# EAGLE board Sparkfun_AS6212_Qwiic-Panel (EAGLE 9.6.2), part 1 of 4
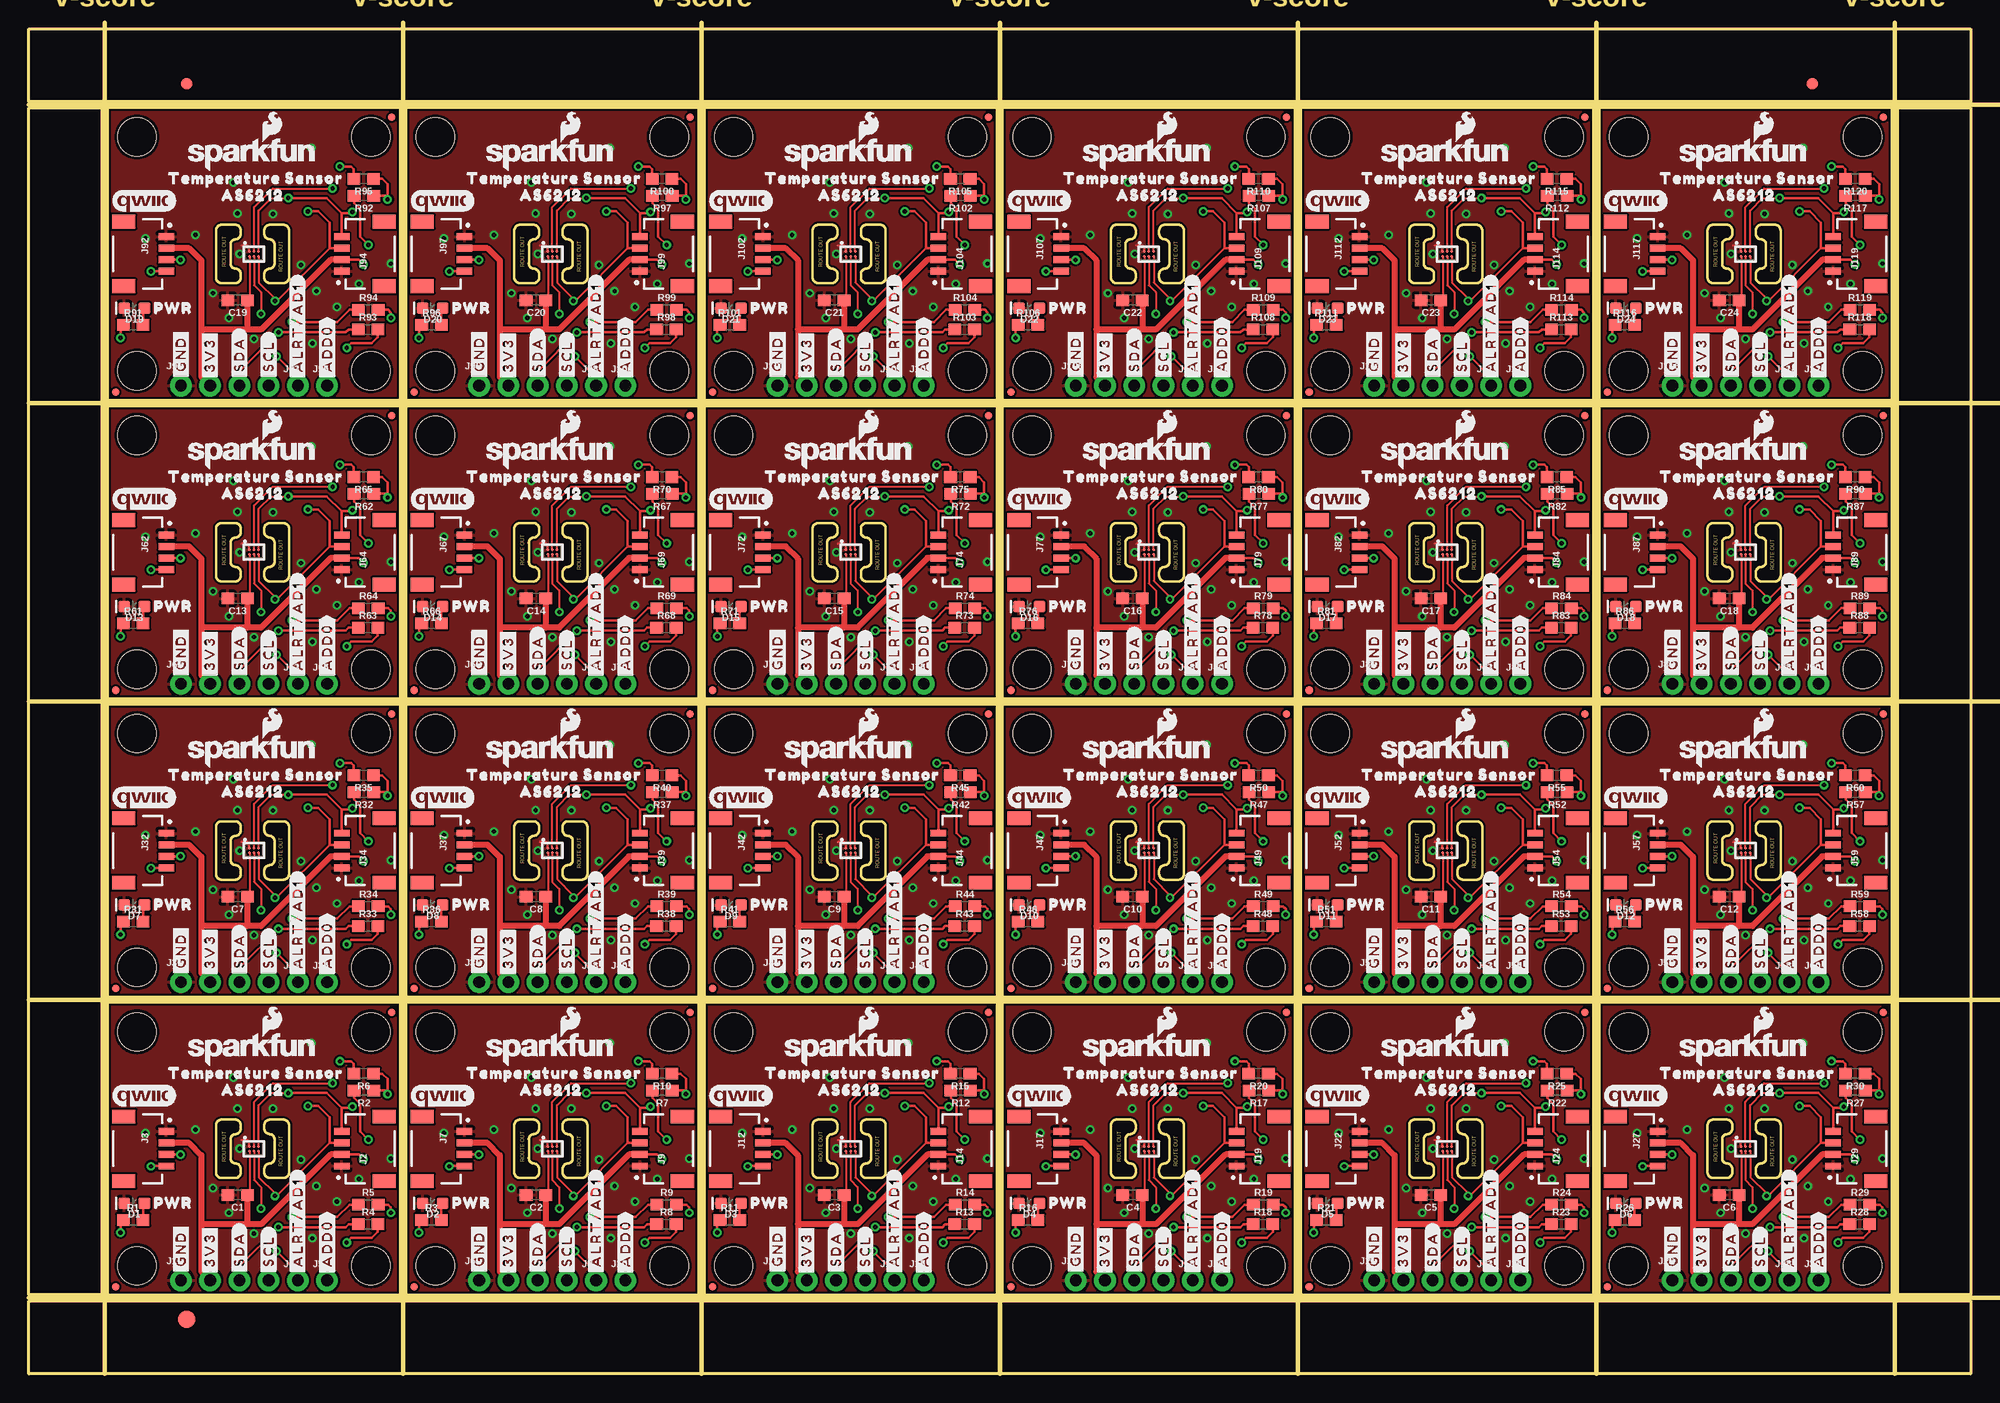
[diagram p0: board, top side]
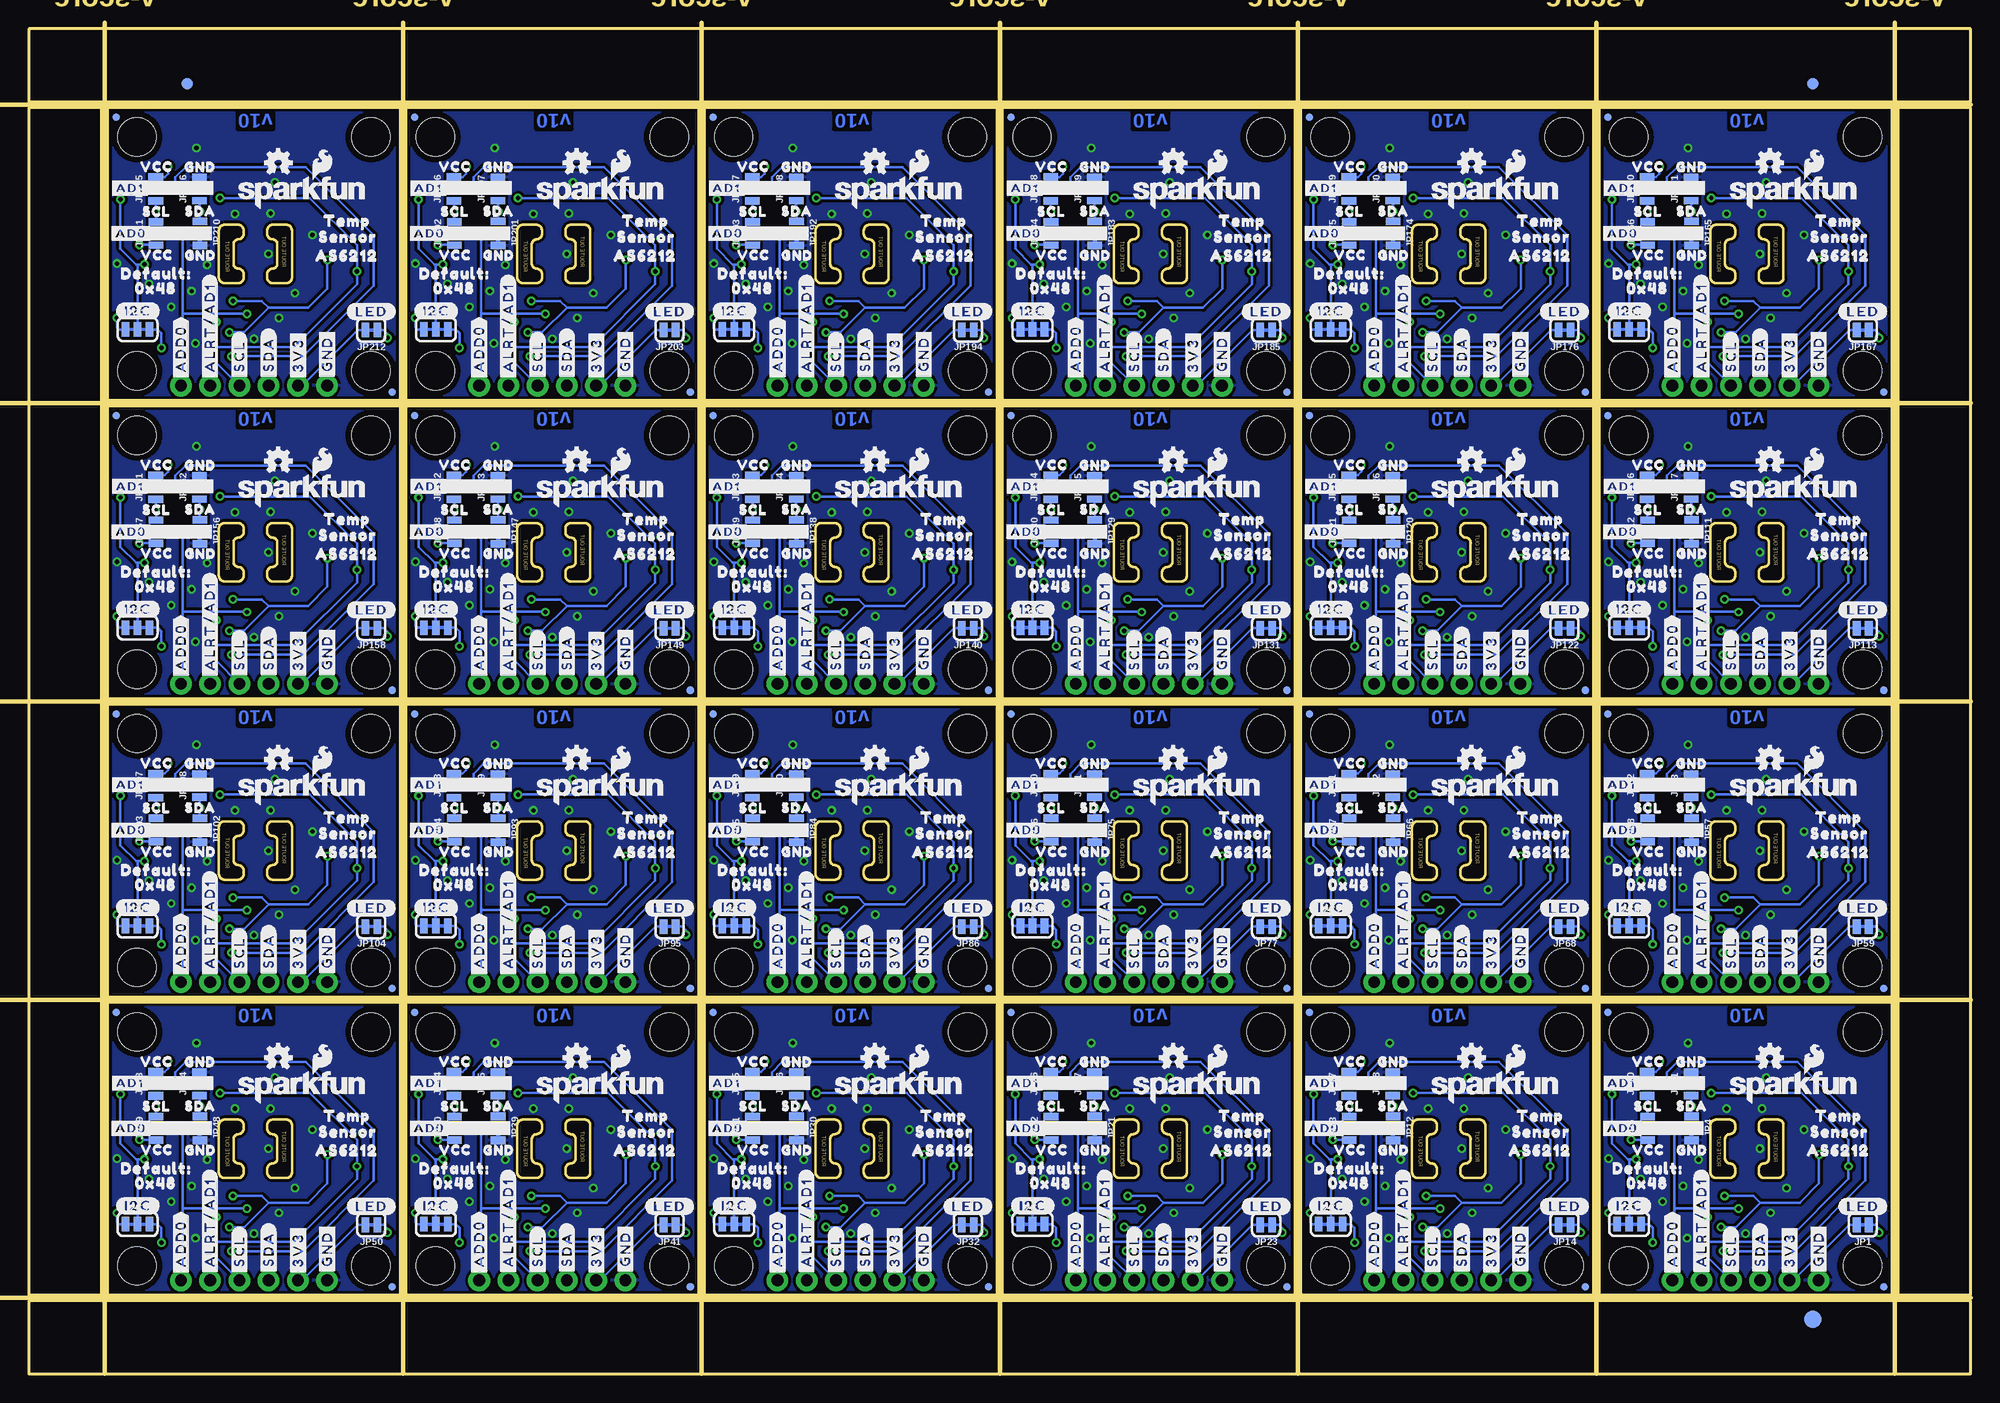
[diagram p1: board, bottom side, seen from below]

Size 168.66 x 116.84 mm. Coordinates in mm from the lower left corner, seen from the top.
Outline: 784 segments
Copper layers (1*16): Top 0.035mm / dielectric 1.5mm / Bottom 0.035mm
Design rules "Sparkfun_AS6212_Qwiic": minimum track width 7mil, minimum drill 0.3mm, track to track 7mil, track to pad 7mil, pad to pad 7mil, via to via 7mil, smd to smd 7mil, copper to edge 7mil, drill to drill 7mil, minimum pad ring 7mil, minimum via ring 7mil, stop-mask expansion 3mil, vias tented up to drill 25mil, thermal gap 10mil
tRestrict: area 18.8,19.7 to 18.8,19.8; area 44.7,19.7 to 44.7,19.8; area 70.6,19.7 to 70.6,19.8; area 96.5,19.7 to 96.5,19.8; area 122.4,19.7 to 122.5,19.8; area 148.3,19.7 to 148.4,19.8; area 18.8,45.6 to 18.8,45.7; area 44.7,45.6 to 44.7,45.7; area 70.6,45.6 to 70.6,45.7; area 96.5,45.6 to 96.5,45.7; area 122.4,45.6 to 122.5,45.7; area 148.3,45.6 to 148.4,45.7; 12 more areas
Milling: 12 lines

## Footprints (pad centres in the part's own frame; a part is rotated, then mirrored left to right if it is on the bottom)
0603 = smd 1.1 x 1: 1 -0.85,0; 2 0.85,0
LED-0603 = smd 1 x 1: A -0.877,0; C 0.877,0
FIDUCIAL-1X2 = smd 1 x 1: 1 0,0
FIDUCIAL-1.5X3 = smd 1.5 x 1.5: 1 0,0
FIDUCIAL-MICRO = smd 0.635 x 0.635: 1 0,0
SMT-JUMPER_3_2-NC_TRACE_SILK = smd 0.66 x 1.27: 1 -1.041,0; 2 0,0; 3 1.041,0
1X04_NO_SILK = drill 1.016 pad 1.88: 1 0,0; 2 2.54,0; 3 5.08,0; 4 7.62,0
JST04_1MM_RA = smd 0.6 x 1.35: 1 -1.5,0; 2 -0.5,0; 3 0.5,0; 4 1.5,0 | smd 1.2 x 2: NC1 2.8,-3.675; NC2 -2.8,-3.675
1X01_NO_SILK = drill 1.016 pad 1.88: 1 0,0
SMT-JUMPER_2_NC_TRACE_SILK = smd 0.66 x 1.27: 1 -0.521,0; 2 0.521,0
STAND-OFF = hole 3.302: 0,0
SMT-JUMPER_3_1-NC_TRACE_NO-SILK = smd 0.66 x 1.27: 1 -1.041,0; 2 0,0; 3 1.041,0
SMT-JUMPER_3_0-NO_TRACE_NO-SILK = smd 0.635 x 1.27: 1 -1.016,0; 2 0,0; 3 1.016,0
WLCSP = smd 0.25 x 0.25: A1 -0.4,0.2; A2 0,0.2; A3 0.4,0.2; B1 -0.4,-0.2; B2 0,-0.2; B3 0.4,-0.2

## Placement (x,y rotation side)
C1  0.1uF  [0603]  18.14,15.54 180 top
C2  0.1uF  [0603]  44.04,15.54 180 top
C3  0.1uF  [0603]  69.95,15.54 180 top
C4  0.1uF  [0603]  95.86,15.54 180 top
C5  0.1uF  [0603]  121.77,15.54 180 top
C6  0.1uF  [0603]  147.68,15.54 180 top
C7  0.1uF  [0603]  18.14,41.45 180 top
C8  0.1uF  [0603]  44.04,41.45 180 top
C9  0.1uF  [0603]  69.95,41.45 180 top
C10  0.1uF  [0603]  95.86,41.45 180 top
C11  0.1uF  [0603]  121.77,41.45 180 top
C12  0.1uF  [0603]  147.68,41.45 180 top
C13  0.1uF  [0603]  18.14,67.36 180 top
C14  0.1uF  [0603]  44.04,67.36 180 top
C15  0.1uF  [0603]  69.95,67.36 180 top
C16  0.1uF  [0603]  95.86,67.36 180 top
C17  0.1uF  [0603]  121.77,67.36 180 top
C18  0.1uF  [0603]  147.68,67.36 180 top
C19  0.1uF  [0603]  18.14,93.27 180 top
C20  0.1uF  [0603]  44.04,93.27 180 top
C21  0.1uF  [0603]  69.95,93.27 180 top
C22  0.1uF  [0603]  95.86,93.27 180 top
C23  0.1uF  [0603]  121.77,93.27 180 top
C24  0.1uF  [0603]  147.68,93.27 180 top
D1  RED  [LED-0603]  9.17,14.83 180 top
D2  RED  [LED-0603]  35.08,14.83 180 top
D3  RED  [LED-0603]  60.99,14.83 180 top
D4  RED  [LED-0603]  86.89,14.83 180 top
D5  RED  [LED-0603]  112.8,14.83 180 top
D6  RED  [LED-0603]  138.71,14.83 180 top
D7  RED  [LED-0603]  9.17,40.74 180 top
D8  RED  [LED-0603]  35.08,40.74 180 top
D9  RED  [LED-0603]  60.99,40.74 180 top
D10  RED  [LED-0603]  86.89,40.74 180 top
D11  RED  [LED-0603]  112.8,40.74 180 top
D12  RED  [LED-0603]  138.71,40.74 180 top
D13  RED  [LED-0603]  9.17,66.65 180 top
D14  RED  [LED-0603]  35.08,66.65 180 top
D15  RED  [LED-0603]  60.99,66.65 180 top
D16  RED  [LED-0603]  86.89,66.65 180 top
D17  RED  [LED-0603]  112.8,66.65 180 top
D18  RED  [LED-0603]  138.71,66.65 180 top
D19  RED  [LED-0603]  9.17,92.56 180 top
D20  RED  [LED-0603]  35.08,92.56 180 top
D21  RED  [LED-0603]  60.99,92.56 180 top
D22  RED  [LED-0603]  86.89,92.56 180 top
D23  RED  [LED-0603]  112.8,92.56 180 top
D24  RED  [LED-0603]  138.71,92.56 180 top
E$1  [FIDUCIAL-1X2]  13.72,112.08 0 top
E$2  [FIDUCIAL-1X2]  13.72,112.08 0 bottom
E$3  [FIDUCIAL-1X2]  154.88,112.08 0 top
E$4  [FIDUCIAL-1X2]  154.88,112.08 0 bottom
E$5  [FIDUCIAL-1.5X3]  13.72,4.76 0 top
E$6  [FIDUCIAL-1.5X3]  13.72,4.76 0 bottom
FD1  FIDUCIALUFIDUCIAL  [FIDUCIAL-MICRO]  7.57,7.57 0 top
FD2  FIDUCIALUFIDUCIAL  [FIDUCIAL-MICRO]  31.52,31.42 0 top
FD3  FIDUCIALUFIDUCIAL  [FIDUCIAL-MICRO]  31.52,31.42 0 bottom
FD4  FIDUCIALUFIDUCIAL  [FIDUCIAL-MICRO]  7.57,7.57 0 bottom
FD5  FIDUCIALUFIDUCIAL  [FIDUCIAL-MICRO]  33.48,7.57 0 top
FD6  FIDUCIALUFIDUCIAL  [FIDUCIAL-MICRO]  57.43,31.42 0 top
FD7  FIDUCIALUFIDUCIAL  [FIDUCIAL-MICRO]  57.43,31.42 0 bottom
FD8  FIDUCIALUFIDUCIAL  [FIDUCIAL-MICRO]  33.48,7.57 0 bottom
FD9  FIDUCIALUFIDUCIAL  [FIDUCIAL-MICRO]  59.39,7.57 0 top
FD10  FIDUCIALUFIDUCIAL  [FIDUCIAL-MICRO]  83.34,31.42 0 top
FD11  FIDUCIALUFIDUCIAL  [FIDUCIAL-MICRO]  83.34,31.42 0 bottom
FD12  FIDUCIALUFIDUCIAL  [FIDUCIAL-MICRO]  59.39,7.57 0 bottom
FD13  FIDUCIALUFIDUCIAL  [FIDUCIAL-MICRO]  85.29,7.57 0 top
FD14  FIDUCIALUFIDUCIAL  [FIDUCIAL-MICRO]  109.25,31.42 0 top
FD15  FIDUCIALUFIDUCIAL  [FIDUCIAL-MICRO]  109.25,31.42 0 bottom
FD16  FIDUCIALUFIDUCIAL  [FIDUCIAL-MICRO]  85.29,7.57 0 bottom
FD17  FIDUCIALUFIDUCIAL  [FIDUCIAL-MICRO]  111.2,7.57 0 top
FD18  FIDUCIALUFIDUCIAL  [FIDUCIAL-MICRO]  135.15,31.42 0 top
FD19  FIDUCIALUFIDUCIAL  [FIDUCIAL-MICRO]  135.15,31.42 0 bottom
FD20  FIDUCIALUFIDUCIAL  [FIDUCIAL-MICRO]  111.2,7.57 0 bottom
FD21  FIDUCIALUFIDUCIAL  [FIDUCIAL-MICRO]  137.11,7.57 0 top
FD22  FIDUCIALUFIDUCIAL  [FIDUCIAL-MICRO]  161.06,31.42 0 top
FD23  FIDUCIALUFIDUCIAL  [FIDUCIAL-MICRO]  161.06,31.42 0 bottom
FD24  FIDUCIALUFIDUCIAL  [FIDUCIAL-MICRO]  137.11,7.57 0 bottom
FD25  FIDUCIALUFIDUCIAL  [FIDUCIAL-MICRO]  7.57,33.48 0 top
FD26  FIDUCIALUFIDUCIAL  [FIDUCIAL-MICRO]  31.52,57.33 0 top
FD27  FIDUCIALUFIDUCIAL  [FIDUCIAL-MICRO]  31.52,57.33 0 bottom
FD28  FIDUCIALUFIDUCIAL  [FIDUCIAL-MICRO]  7.57,33.48 0 bottom
FD29  FIDUCIALUFIDUCIAL  [FIDUCIAL-MICRO]  33.48,33.48 0 top
FD30  FIDUCIALUFIDUCIAL  [FIDUCIAL-MICRO]  57.43,57.33 0 top
FD31  FIDUCIALUFIDUCIAL  [FIDUCIAL-MICRO]  57.43,57.33 0 bottom
FD32  FIDUCIALUFIDUCIAL  [FIDUCIAL-MICRO]  33.48,33.48 0 bottom
FD33  FIDUCIALUFIDUCIAL  [FIDUCIAL-MICRO]  59.39,33.48 0 top
FD34  FIDUCIALUFIDUCIAL  [FIDUCIAL-MICRO]  83.34,57.33 0 top
FD35  FIDUCIALUFIDUCIAL  [FIDUCIAL-MICRO]  83.34,57.33 0 bottom
FD36  FIDUCIALUFIDUCIAL  [FIDUCIAL-MICRO]  59.39,33.48 0 bottom
FD37  FIDUCIALUFIDUCIAL  [FIDUCIAL-MICRO]  85.29,33.48 0 top
FD38  FIDUCIALUFIDUCIAL  [FIDUCIAL-MICRO]  109.25,57.33 0 top
FD39  FIDUCIALUFIDUCIAL  [FIDUCIAL-MICRO]  109.25,57.33 0 bottom
FD40  FIDUCIALUFIDUCIAL  [FIDUCIAL-MICRO]  85.29,33.48 0 bottom
FD41  FIDUCIALUFIDUCIAL  [FIDUCIAL-MICRO]  111.2,33.48 0 top
FD42  FIDUCIALUFIDUCIAL  [FIDUCIAL-MICRO]  135.15,57.33 0 top
FD43  FIDUCIALUFIDUCIAL  [FIDUCIAL-MICRO]  135.15,57.33 0 bottom
FD44  FIDUCIALUFIDUCIAL  [FIDUCIAL-MICRO]  111.2,33.48 0 bottom
FD45  FIDUCIALUFIDUCIAL  [FIDUCIAL-MICRO]  137.11,33.48 0 top
FD46  FIDUCIALUFIDUCIAL  [FIDUCIAL-MICRO]  161.06,57.33 0 top
FD47  FIDUCIALUFIDUCIAL  [FIDUCIAL-MICRO]  161.06,57.33 0 bottom
FD48  FIDUCIALUFIDUCIAL  [FIDUCIAL-MICRO]  137.11,33.48 0 bottom
FD49  FIDUCIALUFIDUCIAL  [FIDUCIAL-MICRO]  7.57,59.39 0 top
FD50  FIDUCIALUFIDUCIAL  [FIDUCIAL-MICRO]  31.52,83.24 0 top
FD51  FIDUCIALUFIDUCIAL  [FIDUCIAL-MICRO]  31.52,83.24 0 bottom
FD52  FIDUCIALUFIDUCIAL  [FIDUCIAL-MICRO]  7.57,59.39 0 bottom
FD53  FIDUCIALUFIDUCIAL  [FIDUCIAL-MICRO]  33.48,59.39 0 top
FD54  FIDUCIALUFIDUCIAL  [FIDUCIAL-MICRO]  57.43,83.24 0 top
FD55  FIDUCIALUFIDUCIAL  [FIDUCIAL-MICRO]  57.43,83.24 0 bottom
FD56  FIDUCIALUFIDUCIAL  [FIDUCIAL-MICRO]  33.48,59.39 0 bottom
FD57  FIDUCIALUFIDUCIAL  [FIDUCIAL-MICRO]  59.39,59.39 0 top
FD58  FIDUCIALUFIDUCIAL  [FIDUCIAL-MICRO]  83.34,83.24 0 top
FD59  FIDUCIALUFIDUCIAL  [FIDUCIAL-MICRO]  83.34,83.24 0 bottom
FD60  FIDUCIALUFIDUCIAL  [FIDUCIAL-MICRO]  59.39,59.39 0 bottom
FD61  FIDUCIALUFIDUCIAL  [FIDUCIAL-MICRO]  85.29,59.39 0 top
FD62  FIDUCIALUFIDUCIAL  [FIDUCIAL-MICRO]  109.25,83.24 0 top
FD63  FIDUCIALUFIDUCIAL  [FIDUCIAL-MICRO]  109.25,83.24 0 bottom
FD64  FIDUCIALUFIDUCIAL  [FIDUCIAL-MICRO]  85.29,59.39 0 bottom
FD65  FIDUCIALUFIDUCIAL  [FIDUCIAL-MICRO]  111.2,59.39 0 top
FD66  FIDUCIALUFIDUCIAL  [FIDUCIAL-MICRO]  135.15,83.24 0 top
FD67  FIDUCIALUFIDUCIAL  [FIDUCIAL-MICRO]  135.15,83.24 0 bottom
FD68  FIDUCIALUFIDUCIAL  [FIDUCIAL-MICRO]  111.2,59.39 0 bottom
FD69  FIDUCIALUFIDUCIAL  [FIDUCIAL-MICRO]  137.11,59.39 0 top
FD70  FIDUCIALUFIDUCIAL  [FIDUCIAL-MICRO]  161.06,83.24 0 top
FD71  FIDUCIALUFIDUCIAL  [FIDUCIAL-MICRO]  161.06,83.24 0 bottom
FD72  FIDUCIALUFIDUCIAL  [FIDUCIAL-MICRO]  137.11,59.39 0 bottom
FD73  FIDUCIALUFIDUCIAL  [FIDUCIAL-MICRO]  7.57,85.29 0 top
FD74  FIDUCIALUFIDUCIAL  [FIDUCIAL-MICRO]  31.52,109.14 0 top
FD75  FIDUCIALUFIDUCIAL  [FIDUCIAL-MICRO]  31.52,109.14 0 bottom
FD76  FIDUCIALUFIDUCIAL  [FIDUCIAL-MICRO]  7.57,85.29 0 bottom
FD77  FIDUCIALUFIDUCIAL  [FIDUCIAL-MICRO]  33.48,85.29 0 top
FD78  FIDUCIALUFIDUCIAL  [FIDUCIAL-MICRO]  57.43,109.14 0 top
FD79  FIDUCIALUFIDUCIAL  [FIDUCIAL-MICRO]  57.43,109.14 0 bottom
FD80  FIDUCIALUFIDUCIAL  [FIDUCIAL-MICRO]  33.48,85.29 0 bottom
FD81  FIDUCIALUFIDUCIAL  [FIDUCIAL-MICRO]  59.39,85.29 0 top
FD82  FIDUCIALUFIDUCIAL  [FIDUCIAL-MICRO]  83.34,109.14 0 top
FD83  FIDUCIALUFIDUCIAL  [FIDUCIAL-MICRO]  83.34,109.14 0 bottom
FD84  FIDUCIALUFIDUCIAL  [FIDUCIAL-MICRO]  59.39,85.29 0 bottom
FD85  FIDUCIALUFIDUCIAL  [FIDUCIAL-MICRO]  85.29,85.29 0 top
FD86  FIDUCIALUFIDUCIAL  [FIDUCIAL-MICRO]  109.25,109.14 0 top
FD87  FIDUCIALUFIDUCIAL  [FIDUCIAL-MICRO]  109.25,109.14 0 bottom
FD88  FIDUCIALUFIDUCIAL  [FIDUCIAL-MICRO]  85.29,85.29 0 bottom
FD89  FIDUCIALUFIDUCIAL  [FIDUCIAL-MICRO]  111.2,85.29 0 top
FD90  FIDUCIALUFIDUCIAL  [FIDUCIAL-MICRO]  135.15,109.14 0 top
FD91  FIDUCIALUFIDUCIAL  [FIDUCIAL-MICRO]  135.15,109.14 0 bottom
FD92  FIDUCIALUFIDUCIAL  [FIDUCIAL-MICRO]  111.2,85.29 0 bottom
FD93  FIDUCIALUFIDUCIAL  [FIDUCIAL-MICRO]  137.11,85.29 0 top
FD94  FIDUCIALUFIDUCIAL  [FIDUCIAL-MICRO]  161.06,109.14 0 top
FD95  FIDUCIALUFIDUCIAL  [FIDUCIAL-MICRO]  161.06,109.14 0 bottom
FD96  FIDUCIALUFIDUCIAL  [FIDUCIAL-MICRO]  137.11,85.29 0 bottom
I2C  [SMT-JUMPER_3_2-NC_TRACE_SILK]  29.67,13 0 bottom
I2C1  [SMT-JUMPER_3_2-NC_TRACE_SILK]  55.58,13 0 bottom
I2C2  [SMT-JUMPER_3_2-NC_TRACE_SILK]  81.48,13 0 bottom
I2C3  [SMT-JUMPER_3_2-NC_TRACE_SILK]  107.39,13 0 bottom
I2C4  [SMT-JUMPER_3_2-NC_TRACE_SILK]  133.3,13 0 bottom
I2C5  [SMT-JUMPER_3_2-NC_TRACE_SILK]  159.21,13 0 bottom
I2C6  [SMT-JUMPER_3_2-NC_TRACE_SILK]  29.67,38.91 0 bottom
I2C7  [SMT-JUMPER_3_2-NC_TRACE_SILK]  55.58,38.91 0 bottom
I2C8  [SMT-JUMPER_3_2-NC_TRACE_SILK]  81.48,38.91 0 bottom
I2C9  [SMT-JUMPER_3_2-NC_TRACE_SILK]  107.39,38.91 0 bottom
I2C10  [SMT-JUMPER_3_2-NC_TRACE_SILK]  133.3,38.91 0 bottom
I2C11  [SMT-JUMPER_3_2-NC_TRACE_SILK]  159.21,38.91 0 bottom
I2C12  [SMT-JUMPER_3_2-NC_TRACE_SILK]  29.67,64.82 0 bottom
I2C13  [SMT-JUMPER_3_2-NC_TRACE_SILK]  55.58,64.82 0 bottom
I2C14  [SMT-JUMPER_3_2-NC_TRACE_SILK]  81.48,64.82 0 bottom
I2C15  [SMT-JUMPER_3_2-NC_TRACE_SILK]  107.39,64.82 0 bottom
I2C16  [SMT-JUMPER_3_2-NC_TRACE_SILK]  133.3,64.82 0 bottom
I2C17  [SMT-JUMPER_3_2-NC_TRACE_SILK]  159.21,64.82 0 bottom
I2C18  [SMT-JUMPER_3_2-NC_TRACE_SILK]  29.67,90.73 0 bottom
I2C19  [SMT-JUMPER_3_2-NC_TRACE_SILK]  55.58,90.73 0 bottom
I2C20  [SMT-JUMPER_3_2-NC_TRACE_SILK]  81.48,90.73 0 bottom
I2C21  [SMT-JUMPER_3_2-NC_TRACE_SILK]  107.39,90.73 0 bottom
I2C22  [SMT-JUMPER_3_2-NC_TRACE_SILK]  133.3,90.73 0 bottom
I2C23  [SMT-JUMPER_3_2-NC_TRACE_SILK]  159.21,90.73 0 bottom
J1  PTH  [1X04_NO_SILK]  13.21,8.13 0 top
J2  QWIIC_RA  [JST04_1MM_RA]  27.18,19.56 90 top
J3  QWIIC_RA  [JST04_1MM_RA]  11.94,19.56 270 top
J4  [1X01_NO_SILK]  23.37,8.13 0 top
J5  [1X01_NO_SILK]  25.91,8.13 0 top
J6  PTH  [1X04_NO_SILK]  39.12,8.13 0 top
J7  QWIIC_RA  [JST04_1MM_RA]  37.85,19.56 270 top
J8  [1X01_NO_SILK]  49.28,8.13 0 top
J9  QWIIC_RA  [JST04_1MM_RA]  53.09,19.56 90 top
J10  [1X01_NO_SILK]  51.82,8.13 0 top
J11  PTH  [1X04_NO_SILK]  65.02,8.13 0 top
J12  QWIIC_RA  [JST04_1MM_RA]  63.75,19.56 270 top
J13  [1X01_NO_SILK]  75.18,8.13 0 top
J14  QWIIC_RA  [JST04_1MM_RA]  78.99,19.56 90 top
J15  [1X01_NO_SILK]  77.72,8.13 0 top
J16  PTH  [1X04_NO_SILK]  90.93,8.13 0 top
J17  QWIIC_RA  [JST04_1MM_RA]  89.66,19.56 270 top
J18  [1X01_NO_SILK]  101.09,8.13 0 top
J19  QWIIC_RA  [JST04_1MM_RA]  104.9,19.56 90 top
J20  [1X01_NO_SILK]  103.63,8.13 0 top
J21  PTH  [1X04_NO_SILK]  116.84,8.13 0 top
J22  QWIIC_RA  [JST04_1MM_RA]  115.57,19.56 270 top
J23  [1X01_NO_SILK]  127,8.13 0 top
J24  QWIIC_RA  [JST04_1MM_RA]  130.81,19.56 90 top
J25  [1X01_NO_SILK]  129.54,8.13 0 top
J26  PTH  [1X04_NO_SILK]  142.75,8.13 0 top
J27  QWIIC_RA  [JST04_1MM_RA]  141.48,19.56 270 top
J28  [1X01_NO_SILK]  152.91,8.13 0 top
J29  QWIIC_RA  [JST04_1MM_RA]  156.72,19.56 90 top
J30  [1X01_NO_SILK]  155.45,8.13 0 top
J31  PTH  [1X04_NO_SILK]  13.21,34.04 0 top
J32  QWIIC_RA  [JST04_1MM_RA]  11.94,45.47 270 top
J33  [1X01_NO_SILK]  23.37,34.04 0 top
J34  QWIIC_RA  [JST04_1MM_RA]  27.18,45.47 90 top
J35  [1X01_NO_SILK]  25.91,34.04 0 top
J36  PTH  [1X04_NO_SILK]  39.12,34.04 0 top
J37  QWIIC_RA  [JST04_1MM_RA]  37.85,45.47 270 top
J38  [1X01_NO_SILK]  49.28,34.04 0 top
J39  QWIIC_RA  [JST04_1MM_RA]  53.09,45.47 90 top
J40  [1X01_NO_SILK]  51.82,34.04 0 top
J41  PTH  [1X04_NO_SILK]  65.02,34.04 0 top
J42  QWIIC_RA  [JST04_1MM_RA]  63.75,45.47 270 top
J43  [1X01_NO_SILK]  75.18,34.04 0 top
J44  QWIIC_RA  [JST04_1MM_RA]  78.99,45.47 90 top
J45  [1X01_NO_SILK]  77.72,34.04 0 top
J46  PTH  [1X04_NO_SILK]  90.93,34.04 0 top
J47  QWIIC_RA  [JST04_1MM_RA]  89.66,45.47 270 top
J48  [1X01_NO_SILK]  101.09,34.04 0 top
J49  QWIIC_RA  [JST04_1MM_RA]  104.9,45.47 90 top
J50  [1X01_NO_SILK]  103.63,34.04 0 top
J51  PTH  [1X04_NO_SILK]  116.84,34.04 0 top
J52  QWIIC_RA  [JST04_1MM_RA]  115.57,45.47 270 top
J53  [1X01_NO_SILK]  127,34.04 0 top
J54  QWIIC_RA  [JST04_1MM_RA]  130.81,45.47 90 top
J55  [1X01_NO_SILK]  129.54,34.04 0 top
J56  PTH  [1X04_NO_SILK]  142.75,34.04 0 top
J57  QWIIC_RA  [JST04_1MM_RA]  141.48,45.47 270 top
J58  [1X01_NO_SILK]  152.91,34.04 0 top
J59  QWIIC_RA  [JST04_1MM_RA]  156.72,45.47 90 top
J60  [1X01_NO_SILK]  155.45,34.04 0 top
J61  PTH  [1X04_NO_SILK]  13.21,59.94 0 top
J62  QWIIC_RA  [JST04_1MM_RA]  11.94,71.37 270 top
J63  [1X01_NO_SILK]  23.37,59.94 0 top
J64  QWIIC_RA  [JST04_1MM_RA]  27.18,71.37 90 top
J65  [1X01_NO_SILK]  25.91,59.94 0 top
J66  PTH  [1X04_NO_SILK]  39.12,59.94 0 top
J67  QWIIC_RA  [JST04_1MM_RA]  37.85,71.37 270 top
J68  [1X01_NO_SILK]  49.28,59.94 0 top
J69  QWIIC_RA  [JST04_1MM_RA]  53.09,71.37 90 top
J70  [1X01_NO_SILK]  51.82,59.94 0 top
J71  PTH  [1X04_NO_SILK]  65.02,59.94 0 top
J72  QWIIC_RA  [JST04_1MM_RA]  63.75,71.37 270 top
J73  [1X01_NO_SILK]  75.18,59.94 0 top
J74  QWIIC_RA  [JST04_1MM_RA]  78.99,71.37 90 top
J75  [1X01_NO_SILK]  77.72,59.94 0 top
J76  PTH  [1X04_NO_SILK]  90.93,59.94 0 top
J77  QWIIC_RA  [JST04_1MM_RA]  89.66,71.37 270 top
J78  [1X01_NO_SILK]  101.09,59.94 0 top
J79  QWIIC_RA  [JST04_1MM_RA]  104.9,71.37 90 top
J80  [1X01_NO_SILK]  103.63,59.94 0 top
J81  PTH  [1X04_NO_SILK]  116.84,59.94 0 top
J82  QWIIC_RA  [JST04_1MM_RA]  115.57,71.37 270 top
J83  [1X01_NO_SILK]  127,59.94 0 top
J84  QWIIC_RA  [JST04_1MM_RA]  130.81,71.37 90 top
J85  [1X01_NO_SILK]  129.54,59.94 0 top
J86  PTH  [1X04_NO_SILK]  142.75,59.94 0 top
J87  QWIIC_RA  [JST04_1MM_RA]  141.48,71.37 270 top
J88  [1X01_NO_SILK]  152.91,59.94 0 top
J89  QWIIC_RA  [JST04_1MM_RA]  156.72,71.37 90 top
J90  [1X01_NO_SILK]  155.45,59.94 0 top
J91  PTH  [1X04_NO_SILK]  13.21,85.85 0 top
J92  QWIIC_RA  [JST04_1MM_RA]  11.94,97.28 270 top
J93  [1X01_NO_SILK]  23.37,85.85 0 top
J94  QWIIC_RA  [JST04_1MM_RA]  27.18,97.28 90 top
J95  [1X01_NO_SILK]  25.91,85.85 0 top
J96  PTH  [1X04_NO_SILK]  39.12,85.85 0 top
J97  QWIIC_RA  [JST04_1MM_RA]  37.85,97.28 270 top
J98  [1X01_NO_SILK]  49.28,85.85 0 top
J99  QWIIC_RA  [JST04_1MM_RA]  53.09,97.28 90 top
J100  [1X01_NO_SILK]  51.82,85.85 0 top
J101  PTH  [1X04_NO_SILK]  65.02,85.85 0 top
J102  QWIIC_RA  [JST04_1MM_RA]  63.75,97.28 270 top
J103  [1X01_NO_SILK]  75.18,85.85 0 top
J104  QWIIC_RA  [JST04_1MM_RA]  78.99,97.28 90 top
J105  [1X01_NO_SILK]  77.72,85.85 0 top
J106  PTH  [1X04_NO_SILK]  90.93,85.85 0 top
J107  QWIIC_RA  [JST04_1MM_RA]  89.66,97.28 270 top
J108  [1X01_NO_SILK]  101.09,85.85 0 top
J109  QWIIC_RA  [JST04_1MM_RA]  104.9,97.28 90 top
J110  [1X01_NO_SILK]  103.63,85.85 0 top
J111  PTH  [1X04_NO_SILK]  116.84,85.85 0 top
J112  QWIIC_RA  [JST04_1MM_RA]  115.57,97.28 270 top
J113  [1X01_NO_SILK]  127,85.85 0 top
J114  QWIIC_RA  [JST04_1MM_RA]  130.81,97.28 90 top
J115  [1X01_NO_SILK]  129.54,85.85 0 top
J116  PTH  [1X04_NO_SILK]  142.75,85.85 0 top
J117  QWIIC_RA  [JST04_1MM_RA]  141.48,97.28 270 top
J118  [1X01_NO_SILK]  152.91,85.85 0 top
J119  QWIIC_RA  [JST04_1MM_RA]  156.72,97.28 90 top
J120  [1X01_NO_SILK]  155.45,85.85 0 top
JP1  LED  [SMT-JUMPER_2_NC_TRACE_SILK]  9.37,12.95 180 bottom
JP2  STAND-OFF  [STAND-OFF]  9.4,9.4 0 top
JP3  STAND-OFF  [STAND-OFF]  29.72,9.4 0 top
JP4  JUMPER-SMT_3_1-NC_TRACE_NO-SILK  [SMT-JUMPER_3_1-NC_TRACE_NO-SILK]  24.26,21.34 270 bottom
JP5  JUMPER-SMT_3_NO_NO_SILK  [SMT-JUMPER_3_0-NO_TRACE_NO-SILK]  28.07,21.34 90 bottom
JP6  STAND-OFF  [STAND-OFF]  55.63,29.72 0 top
JP7  STAND-OFF  [STAND-OFF]  35.31,29.72 0 top
JP8  STAND-OFF  [STAND-OFF]  29.72,29.72 0 top
JP9  STAND-OFF  [STAND-OFF]  9.4,29.72 0 top
JP10  JUMPER-SMT_3_1-NC_TRACE_NO-SILK  [SMT-JUMPER_3_1-NC_TRACE_NO-SILK]  28.09,25.2 90 bottom
JP11  JUMPER-SMT_3_NO_NO_SILK  [SMT-JUMPER_3_0-NO_TRACE_NO-SILK]  24.28,25.2 90 bottom
JP12  JUMPER-SMT_3_1-NC_TRACE_NO-SILK  [SMT-JUMPER_3_1-NC_TRACE_NO-SILK]  50.16,21.34 270 bottom
JP13  JUMPER-SMT_3_NO_NO_SILK  [SMT-JUMPER_3_0-NO_TRACE_NO-SILK]  53.97,21.34 90 bottom
JP14  LED  [SMT-JUMPER_2_NC_TRACE_SILK]  35.28,12.95 180 bottom
JP15  STAND-OFF  [STAND-OFF]  35.31,9.4 0 top
JP16  STAND-OFF  [STAND-OFF]  55.63,9.4 0 top
JP17  JUMPER-SMT_3_1-NC_TRACE_NO-SILK  [SMT-JUMPER_3_1-NC_TRACE_NO-SILK]  54,25.2 90 bottom
JP18  JUMPER-SMT_3_NO_NO_SILK  [SMT-JUMPER_3_0-NO_TRACE_NO-SILK]  50.19,25.2 90 bottom
JP19  STAND-OFF  [STAND-OFF]  81.53,29.72 0 top
JP20  STAND-OFF  [STAND-OFF]  61.21,29.72 0 top
JP21  JUMPER-SMT_3_1-NC_TRACE_NO-SILK  [SMT-JUMPER_3_1-NC_TRACE_NO-SILK]  76.07,21.34 270 bottom
JP22  JUMPER-SMT_3_NO_NO_SILK  [SMT-JUMPER_3_0-NO_TRACE_NO-SILK]  79.88,21.34 90 bottom
JP23  LED  [SMT-JUMPER_2_NC_TRACE_SILK]  61.19,12.95 180 bottom
JP24  STAND-OFF  [STAND-OFF]  61.21,9.4 0 top
JP25  STAND-OFF  [STAND-OFF]  81.53,9.4 0 top
JP26  JUMPER-SMT_3_1-NC_TRACE_NO-SILK  [SMT-JUMPER_3_1-NC_TRACE_NO-SILK]  79.91,25.2 90 bottom
JP27  JUMPER-SMT_3_NO_NO_SILK  [SMT-JUMPER_3_0-NO_TRACE_NO-SILK]  76.1,25.2 90 bottom
JP28  STAND-OFF  [STAND-OFF]  107.44,29.72 0 top
JP29  STAND-OFF  [STAND-OFF]  87.12,29.72 0 top
JP30  JUMPER-SMT_3_1-NC_TRACE_NO-SILK  [SMT-JUMPER_3_1-NC_TRACE_NO-SILK]  101.98,21.34 270 bottom
JP31  JUMPER-SMT_3_NO_NO_SILK  [SMT-JUMPER_3_0-NO_TRACE_NO-SILK]  105.79,21.34 90 bottom
JP32  LED  [SMT-JUMPER_2_NC_TRACE_SILK]  87.1,12.95 180 bottom
JP33  STAND-OFF  [STAND-OFF]  87.12,9.4 0 top
JP34  STAND-OFF  [STAND-OFF]  107.44,9.4 0 top
JP35  JUMPER-SMT_3_1-NC_TRACE_NO-SILK  [SMT-JUMPER_3_1-NC_TRACE_NO-SILK]  105.82,25.2 90 bottom
JP36  JUMPER-SMT_3_NO_NO_SILK  [SMT-JUMPER_3_0-NO_TRACE_NO-SILK]  102.01,25.2 90 bottom
JP37  STAND-OFF  [STAND-OFF]  133.35,29.72 0 top
JP38  STAND-OFF  [STAND-OFF]  113.03,29.72 0 top
JP39  JUMPER-SMT_3_1-NC_TRACE_NO-SILK  [SMT-JUMPER_3_1-NC_TRACE_NO-SILK]  127.89,21.34 270 bottom
JP40  JUMPER-SMT_3_NO_NO_SILK  [SMT-JUMPER_3_0-NO_TRACE_NO-SILK]  131.7,21.34 90 bottom
JP41  LED  [SMT-JUMPER_2_NC_TRACE_SILK]  113,12.95 180 bottom
JP42  STAND-OFF  [STAND-OFF]  113.03,9.4 0 top
JP43  STAND-OFF  [STAND-OFF]  133.35,9.4 0 top
JP44  JUMPER-SMT_3_1-NC_TRACE_NO-SILK  [SMT-JUMPER_3_1-NC_TRACE_NO-SILK]  131.72,25.2 90 bottom
JP45  JUMPER-SMT_3_NO_NO_SILK  [SMT-JUMPER_3_0-NO_TRACE_NO-SILK]  127.91,25.2 90 bottom
JP46  STAND-OFF  [STAND-OFF]  159.26,29.72 0 top
JP47  STAND-OFF  [STAND-OFF]  138.94,29.72 0 top
JP48  JUMPER-SMT_3_1-NC_TRACE_NO-SILK  [SMT-JUMPER_3_1-NC_TRACE_NO-SILK]  153.8,21.34 270 bottom
JP49  JUMPER-SMT_3_NO_NO_SILK  [SMT-JUMPER_3_0-NO_TRACE_NO-SILK]  157.61,21.34 90 bottom
JP50  LED  [SMT-JUMPER_2_NC_TRACE_SILK]  138.91,12.95 180 bottom
JP51  STAND-OFF  [STAND-OFF]  138.94,9.4 0 top
JP52  STAND-OFF  [STAND-OFF]  159.26,9.4 0 top
JP53  JUMPER-SMT_3_1-NC_TRACE_NO-SILK  [SMT-JUMPER_3_1-NC_TRACE_NO-SILK]  157.63,25.2 90 bottom
JP54  JUMPER-SMT_3_NO_NO_SILK  [SMT-JUMPER_3_0-NO_TRACE_NO-SILK]  153.82,25.2 90 bottom
JP55  STAND-OFF  [STAND-OFF]  29.72,55.63 0 top
JP56  STAND-OFF  [STAND-OFF]  9.4,55.63 0 top
JP57  JUMPER-SMT_3_1-NC_TRACE_NO-SILK  [SMT-JUMPER_3_1-NC_TRACE_NO-SILK]  24.26,47.24 270 bottom
JP58  JUMPER-SMT_3_NO_NO_SILK  [SMT-JUMPER_3_0-NO_TRACE_NO-SILK]  28.07,47.24 90 bottom
JP59  LED  [SMT-JUMPER_2_NC_TRACE_SILK]  9.37,38.86 180 bottom
JP60  STAND-OFF  [STAND-OFF]  9.4,35.31 0 top
JP61  STAND-OFF  [STAND-OFF]  29.72,35.31 0 top
JP62  JUMPER-SMT_3_1-NC_TRACE_NO-SILK  [SMT-JUMPER_3_1-NC_TRACE_NO-SILK]  28.09,51.1 90 bottom
JP63  JUMPER-SMT_3_NO_NO_SILK  [SMT-JUMPER_3_0-NO_TRACE_NO-SILK]  24.28,51.1 90 bottom
JP64  STAND-OFF  [STAND-OFF]  55.63,55.63 0 top
JP65  STAND-OFF  [STAND-OFF]  35.31,55.63 0 top
JP66  JUMPER-SMT_3_1-NC_TRACE_NO-SILK  [SMT-JUMPER_3_1-NC_TRACE_NO-SILK]  50.16,47.24 270 bottom
JP67  JUMPER-SMT_3_NO_NO_SILK  [SMT-JUMPER_3_0-NO_TRACE_NO-SILK]  53.97,47.24 90 bottom
JP68  LED  [SMT-JUMPER_2_NC_TRACE_SILK]  35.28,38.86 180 bottom
JP69  STAND-OFF  [STAND-OFF]  35.31,35.31 0 top
JP70  STAND-OFF  [STAND-OFF]  55.63,35.31 0 top
JP71  JUMPER-SMT_3_1-NC_TRACE_NO-SILK  [SMT-JUMPER_3_1-NC_TRACE_NO-SILK]  54,51.1 90 bottom
JP72  JUMPER-SMT_3_NO_NO_SILK  [SMT-JUMPER_3_0-NO_TRACE_NO-SILK]  50.19,51.1 90 bottom
JP73  STAND-OFF  [STAND-OFF]  81.53,55.63 0 top
JP74  STAND-OFF  [STAND-OFF]  61.21,55.63 0 top
JP75  JUMPER-SMT_3_1-NC_TRACE_NO-SILK  [SMT-JUMPER_3_1-NC_TRACE_NO-SILK]  76.07,47.24 270 bottom
JP76  JUMPER-SMT_3_NO_NO_SILK  [SMT-JUMPER_3_0-NO_TRACE_NO-SILK]  79.88,47.24 90 bottom
JP77  LED  [SMT-JUMPER_2_NC_TRACE_SILK]  61.19,38.86 180 bottom
JP78  STAND-OFF  [STAND-OFF]  61.21,35.31 0 top
JP79  STAND-OFF  [STAND-OFF]  81.53,35.31 0 top
JP80  JUMPER-SMT_3_1-NC_TRACE_NO-SILK  [SMT-JUMPER_3_1-NC_TRACE_NO-SILK]  79.91,51.1 90 bottom
JP81  JUMPER-SMT_3_NO_NO_SILK  [SMT-JUMPER_3_0-NO_TRACE_NO-SILK]  76.1,51.1 90 bottom
JP82  STAND-OFF  [STAND-OFF]  107.44,55.63 0 top
JP83  STAND-OFF  [STAND-OFF]  87.12,55.63 0 top
JP84  JUMPER-SMT_3_1-NC_TRACE_NO-SILK  [SMT-JUMPER_3_1-NC_TRACE_NO-SILK]  101.98,47.24 270 bottom
JP85  JUMPER-SMT_3_NO_NO_SILK  [SMT-JUMPER_3_0-NO_TRACE_NO-SILK]  105.79,47.24 90 bottom
JP86  LED  [SMT-JUMPER_2_NC_TRACE_SILK]  87.1,38.86 180 bottom
JP87  STAND-OFF  [STAND-OFF]  87.12,35.31 0 top
JP88  STAND-OFF  [STAND-OFF]  107.44,35.31 0 top
JP89  JUMPER-SMT_3_1-NC_TRACE_NO-SILK  [SMT-JUMPER_3_1-NC_TRACE_NO-SILK]  105.82,51.1 90 bottom
JP90  JUMPER-SMT_3_NO_NO_SILK  [SMT-JUMPER_3_0-NO_TRACE_NO-SILK]  102.01,51.1 90 bottom
JP91  STAND-OFF  [STAND-OFF]  133.35,55.63 0 top
JP92  STAND-OFF  [STAND-OFF]  113.03,55.63 0 top
JP93  JUMPER-SMT_3_1-NC_TRACE_NO-SILK  [SMT-JUMPER_3_1-NC_TRACE_NO-SILK]  127.89,47.24 270 bottom
JP94  JUMPER-SMT_3_NO_NO_SILK  [SMT-JUMPER_3_0-NO_TRACE_NO-SILK]  131.7,47.24 90 bottom
JP95  LED  [SMT-JUMPER_2_NC_TRACE_SILK]  113,38.86 180 bottom
JP96  STAND-OFF  [STAND-OFF]  113.03,35.31 0 top
JP97  STAND-OFF  [STAND-OFF]  133.35,35.31 0 top
JP98  JUMPER-SMT_3_1-NC_TRACE_NO-SILK  [SMT-JUMPER_3_1-NC_TRACE_NO-SILK]  131.72,51.1 90 bottom
JP99  JUMPER-SMT_3_NO_NO_SILK  [SMT-JUMPER_3_0-NO_TRACE_NO-SILK]  127.91,51.1 90 bottom
JP100  STAND-OFF  [STAND-OFF]  159.26,55.63 0 top
JP101  STAND-OFF  [STAND-OFF]  138.94,55.63 0 top
JP102  JUMPER-SMT_3_1-NC_TRACE_NO-SILK  [SMT-JUMPER_3_1-NC_TRACE_NO-SILK]  153.8,47.24 270 bottom
JP103  JUMPER-SMT_3_NO_NO_SILK  [SMT-JUMPER_3_0-NO_TRACE_NO-SILK]  157.61,47.24 90 bottom
JP104  LED  [SMT-JUMPER_2_NC_TRACE_SILK]  138.91,38.86 180 bottom
JP105  STAND-OFF  [STAND-OFF]  138.94,35.31 0 top
JP106  STAND-OFF  [STAND-OFF]  159.26,35.31 0 top
JP107  JUMPER-SMT_3_1-NC_TRACE_NO-SILK  [SMT-JUMPER_3_1-NC_TRACE_NO-SILK]  157.63,51.1 90 bottom
JP108  JUMPER-SMT_3_NO_NO_SILK  [SMT-JUMPER_3_0-NO_TRACE_NO-SILK]  153.82,51.1 90 bottom
JP109  STAND-OFF  [STAND-OFF]  29.72,81.53 0 top
JP110  STAND-OFF  [STAND-OFF]  9.4,81.53 0 top
JP111  JUMPER-SMT_3_1-NC_TRACE_NO-SILK  [SMT-JUMPER_3_1-NC_TRACE_NO-SILK]  24.26,73.15 270 bottom
JP112  JUMPER-SMT_3_NO_NO_SILK  [SMT-JUMPER_3_0-NO_TRACE_NO-SILK]  28.07,73.15 90 bottom
JP113  LED  [SMT-JUMPER_2_NC_TRACE_SILK]  9.37,64.77 180 bottom
JP114  STAND-OFF  [STAND-OFF]  9.4,61.21 0 top
JP115  STAND-OFF  [STAND-OFF]  29.72,61.21 0 top
JP116  JUMPER-SMT_3_1-NC_TRACE_NO-SILK  [SMT-JUMPER_3_1-NC_TRACE_NO-SILK]  28.09,77.01 90 bottom
JP117  JUMPER-SMT_3_NO_NO_SILK  [SMT-JUMPER_3_0-NO_TRACE_NO-SILK]  24.28,77.01 90 bottom
JP118  STAND-OFF  [STAND-OFF]  55.63,81.53 0 top
JP119  STAND-OFF  [STAND-OFF]  35.31,81.53 0 top
JP120  JUMPER-SMT_3_1-NC_TRACE_NO-SILK  [SMT-JUMPER_3_1-NC_TRACE_NO-SILK]  50.16,73.15 270 bottom
JP121  JUMPER-SMT_3_NO_NO_SILK  [SMT-JUMPER_3_0-NO_TRACE_NO-SILK]  53.97,73.15 90 bottom
JP122  LED  [SMT-JUMPER_2_NC_TRACE_SILK]  35.28,64.77 180 bottom
JP123  STAND-OFF  [STAND-OFF]  35.31,61.21 0 top
JP124  STAND-OFF  [STAND-OFF]  55.63,61.21 0 top
JP125  JUMPER-SMT_3_1-NC_TRACE_NO-SILK  [SMT-JUMPER_3_1-NC_TRACE_NO-SILK]  54,77.01 90 bottom
JP126  JUMPER-SMT_3_NO_NO_SILK  [SMT-JUMPER_3_0-NO_TRACE_NO-SILK]  50.19,77.01 90 bottom
JP127  STAND-OFF  [STAND-OFF]  81.53,81.53 0 top
JP128  STAND-OFF  [STAND-OFF]  61.21,81.53 0 top
JP129  JUMPER-SMT_3_1-NC_TRACE_NO-SILK  [SMT-JUMPER_3_1-NC_TRACE_NO-SILK]  76.07,73.15 270 bottom
JP130  JUMPER-SMT_3_NO_NO_SILK  [SMT-JUMPER_3_0-NO_TRACE_NO-SILK]  79.88,73.15 90 bottom
JP131  LED  [SMT-JUMPER_2_NC_TRACE_SILK]  61.19,64.77 180 bottom
JP132  STAND-OFF  [STAND-OFF]  61.21,61.21 0 top
JP133  STAND-OFF  [STAND-OFF]  81.53,61.21 0 top
JP134  JUMPER-SMT_3_1-NC_TRACE_NO-SILK  [SMT-JUMPER_3_1-NC_TRACE_NO-SILK]  79.91,77.01 90 bottom
JP135  JUMPER-SMT_3_NO_NO_SILK  [SMT-JUMPER_3_0-NO_TRACE_NO-SILK]  76.1,77.01 90 bottom
JP136  STAND-OFF  [STAND-OFF]  107.44,81.53 0 top
JP137  STAND-OFF  [STAND-OFF]  87.12,81.53 0 top
JP138  JUMPER-SMT_3_1-NC_TRACE_NO-SILK  [SMT-JUMPER_3_1-NC_TRACE_NO-SILK]  101.98,73.15 270 bottom
JP139  JUMPER-SMT_3_NO_NO_SILK  [SMT-JUMPER_3_0-NO_TRACE_NO-SILK]  105.79,73.15 90 bottom
JP140  LED  [SMT-JUMPER_2_NC_TRACE_SILK]  87.1,64.77 180 bottom
JP141  STAND-OFF  [STAND-OFF]  87.12,61.21 0 top
JP142  STAND-OFF  [STAND-OFF]  107.44,61.21 0 top
JP143  JUMPER-SMT_3_1-NC_TRACE_NO-SILK  [SMT-JUMPER_3_1-NC_TRACE_NO-SILK]  105.82,77.01 90 bottom
JP144  JUMPER-SMT_3_NO_NO_SILK  [SMT-JUMPER_3_0-NO_TRACE_NO-SILK]  102.01,77.01 90 bottom
JP145  STAND-OFF  [STAND-OFF]  133.35,81.53 0 top
JP146  STAND-OFF  [STAND-OFF]  113.03,81.53 0 top
JP147  JUMPER-SMT_3_1-NC_TRACE_NO-SILK  [SMT-JUMPER_3_1-NC_TRACE_NO-SILK]  127.89,73.15 270 bottom
JP148  JUMPER-SMT_3_NO_NO_SILK  [SMT-JUMPER_3_0-NO_TRACE_NO-SILK]  131.7,73.15 90 bottom
JP149  LED  [SMT-JUMPER_2_NC_TRACE_SILK]  113,64.77 180 bottom
JP150  STAND-OFF  [STAND-OFF]  113.03,61.21 0 top
JP151  STAND-OFF  [STAND-OFF]  133.35,61.21 0 top
JP152  JUMPER-SMT_3_1-NC_TRACE_NO-SILK  [SMT-JUMPER_3_1-NC_TRACE_NO-SILK]  131.72,77.01 90 bottom
JP153  JUMPER-SMT_3_NO_NO_SILK  [SMT-JUMPER_3_0-NO_TRACE_NO-SILK]  127.91,77.01 90 bottom
JP154  STAND-OFF  [STAND-OFF]  159.26,81.53 0 top
JP155  STAND-OFF  [STAND-OFF]  138.94,81.53 0 top
JP156  JUMPER-SMT_3_1-NC_TRACE_NO-SILK  [SMT-JUMPER_3_1-NC_TRACE_NO-SILK]  153.8,73.15 270 bottom
JP157  JUMPER-SMT_3_NO_NO_SILK  [SMT-JUMPER_3_0-NO_TRACE_NO-SILK]  157.61,73.15 90 bottom
JP158  LED  [SMT-JUMPER_2_NC_TRACE_SILK]  138.91,64.77 180 bottom
JP159  STAND-OFF  [STAND-OFF]  138.94,61.21 0 top
JP160  STAND-OFF  [STAND-OFF]  159.26,61.21 0 top
JP161  JUMPER-SMT_3_1-NC_TRACE_NO-SILK  [SMT-JUMPER_3_1-NC_TRACE_NO-SILK]  157.63,77.01 90 bottom
JP162  JUMPER-SMT_3_NO_NO_SILK  [SMT-JUMPER_3_0-NO_TRACE_NO-SILK]  153.82,77.01 90 bottom
JP163  STAND-OFF  [STAND-OFF]  29.72,107.44 0 top
JP164  STAND-OFF  [STAND-OFF]  9.4,107.44 0 top
JP165  JUMPER-SMT_3_1-NC_TRACE_NO-SILK  [SMT-JUMPER_3_1-NC_TRACE_NO-SILK]  24.26,99.06 270 bottom
JP166  JUMPER-SMT_3_NO_NO_SILK  [SMT-JUMPER_3_0-NO_TRACE_NO-SILK]  28.07,99.06 90 bottom
JP167  LED  [SMT-JUMPER_2_NC_TRACE_SILK]  9.37,90.68 180 bottom
JP168  STAND-OFF  [STAND-OFF]  9.4,87.12 0 top
JP169  STAND-OFF  [STAND-OFF]  29.72,87.12 0 top
JP170  JUMPER-SMT_3_1-NC_TRACE_NO-SILK  [SMT-JUMPER_3_1-NC_TRACE_NO-SILK]  28.09,102.92 90 bottom
JP171  JUMPER-SMT_3_NO_NO_SILK  [SMT-JUMPER_3_0-NO_TRACE_NO-SILK]  24.28,102.92 90 bottom
JP172  STAND-OFF  [STAND-OFF]  55.63,107.44 0 top
JP173  STAND-OFF  [STAND-OFF]  35.31,107.44 0 top
JP174  JUMPER-SMT_3_1-NC_TRACE_NO-SILK  [SMT-JUMPER_3_1-NC_TRACE_NO-SILK]  50.16,99.06 270 bottom
JP175  JUMPER-SMT_3_NO_NO_SILK  [SMT-JUMPER_3_0-NO_TRACE_NO-SILK]  53.97,99.06 90 bottom
JP176  LED  [SMT-JUMPER_2_NC_TRACE_SILK]  35.28,90.68 180 bottom
JP177  STAND-OFF  [STAND-OFF]  35.31,87.12 0 top
JP178  STAND-OFF  [STAND-OFF]  55.63,87.12 0 top
JP179  JUMPER-SMT_3_1-NC_TRACE_NO-SILK  [SMT-JUMPER_3_1-NC_TRACE_NO-SILK]  54,102.92 90 bottom
JP180  JUMPER-SMT_3_NO_NO_SILK  [SMT-JUMPER_3_0-NO_TRACE_NO-SILK]  50.19,102.92 90 bottom
JP181  STAND-OFF  [STAND-OFF]  81.53,107.44 0 top
JP182  STAND-OFF  [STAND-OFF]  61.21,107.44 0 top
JP183  JUMPER-SMT_3_1-NC_TRACE_NO-SILK  [SMT-JUMPER_3_1-NC_TRACE_NO-SILK]  76.07,99.06 270 bottom
JP184  JUMPER-SMT_3_NO_NO_SILK  [SMT-JUMPER_3_0-NO_TRACE_NO-SILK]  79.88,99.06 90 bottom
JP185  LED  [SMT-JUMPER_2_NC_TRACE_SILK]  61.19,90.68 180 bottom
JP186  STAND-OFF  [STAND-OFF]  61.21,87.12 0 top
JP187  STAND-OFF  [STAND-OFF]  81.53,87.12 0 top
JP188  JUMPER-SMT_3_1-NC_TRACE_NO-SILK  [SMT-JUMPER_3_1-NC_TRACE_NO-SILK]  79.91,102.92 90 bottom
JP189  JUMPER-SMT_3_NO_NO_SILK  [SMT-JUMPER_3_0-NO_TRACE_NO-SILK]  76.1,102.92 90 bottom
JP190  STAND-OFF  [STAND-OFF]  107.44,107.44 0 top
JP191  STAND-OFF  [STAND-OFF]  87.12,107.44 0 top
JP192  JUMPER-SMT_3_1-NC_TRACE_NO-SILK  [SMT-JUMPER_3_1-NC_TRACE_NO-SILK]  101.98,99.06 270 bottom
JP193  JUMPER-SMT_3_NO_NO_SILK  [SMT-JUMPER_3_0-NO_TRACE_NO-SILK]  105.79,99.06 90 bottom
JP194  LED  [SMT-JUMPER_2_NC_TRACE_SILK]  87.1,90.68 180 bottom
JP195  STAND-OFF  [STAND-OFF]  87.12,87.12 0 top
JP196  STAND-OFF  [STAND-OFF]  107.44,87.12 0 top
JP197  JUMPER-SMT_3_1-NC_TRACE_NO-SILK  [SMT-JUMPER_3_1-NC_TRACE_NO-SILK]  105.82,102.92 90 bottom
JP198  JUMPER-SMT_3_NO_NO_SILK  [SMT-JUMPER_3_0-NO_TRACE_NO-SILK]  102.01,102.92 90 bottom
JP199  STAND-OFF  [STAND-OFF]  133.35,107.44 0 top
JP200  STAND-OFF  [STAND-OFF]  113.03,107.44 0 top
JP201  JUMPER-SMT_3_1-NC_TRACE_NO-SILK  [SMT-JUMPER_3_1-NC_TRACE_NO-SILK]  127.89,99.06 270 bottom
JP202  JUMPER-SMT_3_NO_NO_SILK  [SMT-JUMPER_3_0-NO_TRACE_NO-SILK]  131.7,99.06 90 bottom
JP203  LED  [SMT-JUMPER_2_NC_TRACE_SILK]  113,90.68 180 bottom
JP204  STAND-OFF  [STAND-OFF]  113.03,87.12 0 top
JP205  STAND-OFF  [STAND-OFF]  133.35,87.12 0 top
JP206  JUMPER-SMT_3_1-NC_TRACE_NO-SILK  [SMT-JUMPER_3_1-NC_TRACE_NO-SILK]  131.72,102.92 90 bottom
JP207  JUMPER-SMT_3_NO_NO_SILK  [SMT-JUMPER_3_0-NO_TRACE_NO-SILK]  127.91,102.92 90 bottom
JP208  STAND-OFF  [STAND-OFF]  159.26,107.44 0 top
JP209  STAND-OFF  [STAND-OFF]  138.94,107.44 0 top
JP210  JUMPER-SMT_3_1-NC_TRACE_NO-SILK  [SMT-JUMPER_3_1-NC_TRACE_NO-SILK]  153.8,99.06 270 bottom
JP211  JUMPER-SMT_3_NO_NO_SILK  [SMT-JUMPER_3_0-NO_TRACE_NO-SILK]  157.61,99.06 90 bottom
JP212  LED  [SMT-JUMPER_2_NC_TRACE_SILK]  138.91,90.68 180 bottom
JP213  STAND-OFF  [STAND-OFF]  138.94,87.12 0 top
JP214  STAND-OFF  [STAND-OFF]  159.26,87.12 0 top
JP215  JUMPER-SMT_3_1-NC_TRACE_NO-SILK  [SMT-JUMPER_3_1-NC_TRACE_NO-SILK]  157.63,102.92 90 bottom
JP216  JUMPER-SMT_3_NO_NO_SILK  [SMT-JUMPER_3_0-NO_TRACE_NO-SILK]  153.82,102.92 90 bottom
LOGO1  OSHW-LOGOMINI  [OSHW-LOGO-MINI]  17.45,27.48 0 bottom
LOGO2  SFE_LOGO_NAME_FLAME.1_INCH  [SFE_LOGO_NAME_FLAME_.1]  15.34,24.92 0 bottom
LOGO3  OSHW-LOGOMINI  [OSHW-LOGO-MINI]  43.36,27.48 0 bottom
LOGO4  SFE_LOGO_NAME_FLAME.1_INCH  [SFE_LOGO_NAME_FLAME_.1]  19.41,28.19 0 top
LOGO5  SFE_LOGO_NAME_FLAME.1_INCH  [SFE_LOGO_NAME_FLAME_.1]  45.31,28.19 0 top
LOGO6  SFE_LOGO_NAME_FLAME.1_INCH  [SFE_LOGO_NAME_FLAME_.1]  41.25,24.92 0 bottom
LOGO7  OSHW-LOGOMINI  [OSHW-LOGO-MINI]  69.27,27.48 0 bottom
LOGO8  SFE_LOGO_NAME_FLAME.1_INCH  [SFE_LOGO_NAME_FLAME_.1]  71.22,28.19 0 top
LOGO9  SFE_LOGO_NAME_FLAME.1_INCH  [SFE_LOGO_NAME_FLAME_.1]  67.16,24.92 0 bottom
LOGO10  OSHW-LOGOMINI  [OSHW-LOGO-MINI]  95.17,27.48 0 bottom
LOGO11  SFE_LOGO_NAME_FLAME.1_INCH  [SFE_LOGO_NAME_FLAME_.1]  97.13,28.19 0 top
LOGO12  SFE_LOGO_NAME_FLAME.1_INCH  [SFE_LOGO_NAME_FLAME_.1]  93.07,24.92 0 bottom
LOGO13  OSHW-LOGOMINI  [OSHW-LOGO-MINI]  121.08,27.48 0 bottom
LOGO14  SFE_LOGO_NAME_FLAME.1_INCH  [SFE_LOGO_NAME_FLAME_.1]  123.04,28.19 0 top
LOGO15  SFE_LOGO_NAME_FLAME.1_INCH  [SFE_LOGO_NAME_FLAME_.1]  118.97,24.92 0 bottom
LOGO16  OSHW-LOGOMINI  [OSHW-LOGO-MINI]  146.99,27.48 0 bottom
LOGO17  SFE_LOGO_NAME_FLAME.1_INCH  [SFE_LOGO_NAME_FLAME_.1]  148.95,28.19 0 top
LOGO18  SFE_LOGO_NAME_FLAME.1_INCH  [SFE_LOGO_NAME_FLAME_.1]  144.88,24.92 0 bottom
LOGO19  OSHW-LOGOMINI  [OSHW-LOGO-MINI]  17.45,53.39 0 bottom
LOGO20  SFE_LOGO_NAME_FLAME.1_INCH  [SFE_LOGO_NAME_FLAME_.1]  19.41,54.1 0 top
LOGO21  SFE_LOGO_NAME_FLAME.1_INCH  [SFE_LOGO_NAME_FLAME_.1]  15.34,50.83 0 bottom
LOGO22  OSHW-LOGOMINI  [OSHW-LOGO-MINI]  43.36,53.39 0 bottom
LOGO23  SFE_LOGO_NAME_FLAME.1_INCH  [SFE_LOGO_NAME_FLAME_.1]  45.31,54.1 0 top
LOGO24  SFE_LOGO_NAME_FLAME.1_INCH  [SFE_LOGO_NAME_FLAME_.1]  41.25,50.83 0 bottom
LOGO25  OSHW-LOGOMINI  [OSHW-LOGO-MINI]  69.27,53.39 0 bottom
LOGO26  SFE_LOGO_NAME_FLAME.1_INCH  [SFE_LOGO_NAME_FLAME_.1]  71.22,54.1 0 top
LOGO27  SFE_LOGO_NAME_FLAME.1_INCH  [SFE_LOGO_NAME_FLAME_.1]  67.16,50.83 0 bottom
LOGO28  OSHW-LOGOMINI  [OSHW-LOGO-MINI]  95.17,53.39 0 bottom
LOGO29  SFE_LOGO_NAME_FLAME.1_INCH  [SFE_LOGO_NAME_FLAME_.1]  97.13,54.1 0 top
LOGO30  SFE_LOGO_NAME_FLAME.1_INCH  [SFE_LOGO_NAME_FLAME_.1]  93.07,50.83 0 bottom
LOGO31  OSHW-LOGOMINI  [OSHW-LOGO-MINI]  121.08,53.39 0 bottom
LOGO32  SFE_LOGO_NAME_FLAME.1_INCH  [SFE_LOGO_NAME_FLAME_.1]  123.04,54.1 0 top
LOGO33  SFE_LOGO_NAME_FLAME.1_INCH  [SFE_LOGO_NAME_FLAME_.1]  118.97,50.83 0 bottom
LOGO34  OSHW-LOGOMINI  [OSHW-LOGO-MINI]  146.99,53.39 0 bottom
LOGO35  SFE_LOGO_NAME_FLAME.1_INCH  [SFE_LOGO_NAME_FLAME_.1]  148.95,54.1 0 top
LOGO36  SFE_LOGO_NAME_FLAME.1_INCH  [SFE_LOGO_NAME_FLAME_.1]  144.88,50.83 0 bottom
LOGO37  OSHW-LOGOMINI  [OSHW-LOGO-MINI]  17.45,79.3 0 bottom
LOGO38  SFE_LOGO_NAME_FLAME.1_INCH  [SFE_LOGO_NAME_FLAME_.1]  19.41,80.01 0 top
LOGO39  SFE_LOGO_NAME_FLAME.1_INCH  [SFE_LOGO_NAME_FLAME_.1]  15.34,76.73 0 bottom
LOGO40  OSHW-LOGOMINI  [OSHW-LOGO-MINI]  43.36,79.3 0 bottom
LOGO41  SFE_LOGO_NAME_FLAME.1_INCH  [SFE_LOGO_NAME_FLAME_.1]  45.31,80.01 0 top
LOGO42  SFE_LOGO_NAME_FLAME.1_INCH  [SFE_LOGO_NAME_FLAME_.1]  41.25,76.73 0 bottom
LOGO43  OSHW-LOGOMINI  [OSHW-LOGO-MINI]  69.27,79.3 0 bottom
LOGO44  SFE_LOGO_NAME_FLAME.1_INCH  [SFE_LOGO_NAME_FLAME_.1]  71.22,80.01 0 top
LOGO45  SFE_LOGO_NAME_FLAME.1_INCH  [SFE_LOGO_NAME_FLAME_.1]  67.16,76.73 0 bottom
LOGO46  OSHW-LOGOMINI  [OSHW-LOGO-MINI]  95.17,79.3 0 bottom
LOGO47  SFE_LOGO_NAME_FLAME.1_INCH  [SFE_LOGO_NAME_FLAME_.1]  97.13,80.01 0 top
LOGO48  SFE_LOGO_NAME_FLAME.1_INCH  [SFE_LOGO_NAME_FLAME_.1]  93.07,76.73 0 bottom
LOGO49  OSHW-LOGOMINI  [OSHW-LOGO-MINI]  121.08,79.3 0 bottom
LOGO50  SFE_LOGO_NAME_FLAME.1_INCH  [SFE_LOGO_NAME_FLAME_.1]  123.04,80.01 0 top
LOGO51  SFE_LOGO_NAME_FLAME.1_INCH  [SFE_LOGO_NAME_FLAME_.1]  118.97,76.73 0 bottom
LOGO52  OSHW-LOGOMINI  [OSHW-LOGO-MINI]  146.99,79.3 0 bottom
LOGO53  SFE_LOGO_NAME_FLAME.1_INCH  [SFE_LOGO_NAME_FLAME_.1]  148.95,80.01 0 top
LOGO54  SFE_LOGO_NAME_FLAME.1_INCH  [SFE_LOGO_NAME_FLAME_.1]  144.88,76.73 0 bottom
LOGO55  OSHW-LOGOMINI  [OSHW-LOGO-MINI]  17.45,105.21 0 bottom
LOGO56  SFE_LOGO_NAME_FLAME.1_INCH  [SFE_LOGO_NAME_FLAME_.1]  19.41,105.92 0 top
LOGO57  SFE_LOGO_NAME_FLAME.1_INCH  [SFE_LOGO_NAME_FLAME_.1]  15.34,102.64 0 bottom
LOGO58  OSHW-LOGOMINI  [OSHW-LOGO-MINI]  43.36,105.21 0 bottom
LOGO59  SFE_LOGO_NAME_FLAME.1_INCH  [SFE_LOGO_NAME_FLAME_.1]  45.31,105.92 0 top
LOGO60  SFE_LOGO_NAME_FLAME.1_INCH  [SFE_LOGO_NAME_FLAME_.1]  41.25,102.64 0 bottom
LOGO61  OSHW-LOGOMINI  [OSHW-LOGO-MINI]  69.27,105.21 0 bottom
LOGO62  SFE_LOGO_NAME_FLAME.1_INCH  [SFE_LOGO_NAME_FLAME_.1]  71.22,105.92 0 top
LOGO63  SFE_LOGO_NAME_FLAME.1_INCH  [SFE_LOGO_NAME_FLAME_.1]  67.16,102.64 0 bottom
LOGO64  OSHW-LOGOMINI  [OSHW-LOGO-MINI]  95.17,105.21 0 bottom
LOGO65  SFE_LOGO_NAME_FLAME.1_INCH  [SFE_LOGO_NAME_FLAME_.1]  97.13,105.92 0 top
LOGO66  SFE_LOGO_NAME_FLAME.1_INCH  [SFE_LOGO_NAME_FLAME_.1]  93.07,102.64 0 bottom
LOGO67  OSHW-LOGOMINI  [OSHW-LOGO-MINI]  121.08,105.21 0 bottom
LOGO68  SFE_LOGO_NAME_FLAME.1_INCH  [SFE_LOGO_NAME_FLAME_.1]  123.04,105.92 0 top
LOGO69  SFE_LOGO_NAME_FLAME.1_INCH  [SFE_LOGO_NAME_FLAME_.1]  118.97,102.64 0 bottom
LOGO70  OSHW-LOGOMINI  [OSHW-LOGO-MINI]  146.99,105.21 0 bottom
LOGO71  SFE_LOGO_NAME_FLAME.1_INCH  [SFE_LOGO_NAME_FLAME_.1]  148.95,105.92 0 top
LOGO72  SFE_LOGO_NAME_FLAME.1_INCH  [SFE_LOGO_NAME_FLAME_.1]  144.88,102.64 0 bottom
R1  1k  [0603]  9.07,13.39 0 top
R2  10k  [0603]  29.11,24.61 180 top
R3  1k  [0603]  34.98,13.39 0 top
R4  2.2k  [0603]  29.46,13 0 top
R5  2.2k  [0603]  29.49,14.71 0 top
R6  10k  [0603]  29.08,26.09 180 top
R7  10k  [0603]  55.02,24.61 180 top
R8  2.2k  [0603]  55.37,13 0 top
R9  2.2k  [0603]  55.4,14.71 0 top
R10  10k  [0603]  54.99,26.09 180 top
R11  1k  [0603]  60.88,13.39 0 top
R12  10k  [0603]  80.92,24.61 180 top
R13  2.2k  [0603]  81.28,13 0 top
R14  2.2k  [0603]  81.31,14.71 0 top
R15  10k  [0603]  80.9,26.09 180 top
R16  1k  [0603]  86.79,13.39 0 top
R17  10k  [0603]  106.83,24.61 180 top
R18  2.2k  [0603]  107.19,13 0 top
R19  2.2k  [0603]  107.21,14.71 0 top
R20  10k  [0603]  106.81,26.09 180 top
R21  1k  [0603]  112.7,13.39 0 top
R22  10k  [0603]  132.74,24.61 180 top
R23  2.2k  [0603]  133.1,13 0 top
R24  2.2k  [0603]  133.12,14.71 0 top
R25  10k  [0603]  132.72,26.09 180 top
R26  1k  [0603]  138.61,13.39 0 top
R27  10k  [0603]  158.65,24.61 180 top
R28  2.2k  [0603]  159,13 0 top
R29  2.2k  [0603]  159.03,14.71 0 top
R30  10k  [0603]  158.62,26.09 180 top
R31  1k  [0603]  9.07,39.29 0 top
R32  10k  [0603]  29.11,50.52 180 top
R33  2.2k  [0603]  29.46,38.91 0 top
R34  2.2k  [0603]  29.49,40.61 0 top
R35  10k  [0603]  29.08,51.99 180 top
R36  1k  [0603]  34.98,39.29 0 top
R37  10k  [0603]  55.02,50.52 180 top
R38  2.2k  [0603]  55.37,38.91 0 top
R39  2.2k  [0603]  55.4,40.61 0 top
R40  10k  [0603]  54.99,51.99 180 top
R41  1k  [0603]  60.88,39.29 0 top
R42  10k  [0603]  80.92,50.52 180 top
R43  2.2k  [0603]  81.28,38.91 0 top
R44  2.2k  [0603]  81.31,40.61 0 top
R45  10k  [0603]  80.9,51.99 180 top
R46  1k  [0603]  86.79,39.29 0 top
R47  10k  [0603]  106.83,50.52 180 top
R48  2.2k  [0603]  107.19,38.91 0 top
R49  2.2k  [0603]  107.21,40.61 0 top
R50  10k  [0603]  106.81,51.99 180 top
R51  1k  [0603]  112.7,39.29 0 top
R52  10k  [0603]  132.74,50.52 180 top
R53  2.2k  [0603]  133.1,38.91 0 top
R54  2.2k  [0603]  133.12,40.61 0 top
R55  10k  [0603]  132.72,51.99 180 top
R56  1k  [0603]  138.61,39.29 0 top
R57  10k  [0603]  158.65,50.52 180 top
R58  2.2k  [0603]  159,38.91 0 top
R59  2.2k  [0603]  159.03,40.61 0 top
R60  10k  [0603]  158.62,51.99 180 top
R61  1k  [0603]  9.07,65.2 0 top
R62  10k  [0603]  29.11,76.43 180 top
R63  2.2k  [0603]  29.46,64.82 0 top
R64  2.2k  [0603]  29.49,66.52 0 top
R65  10k  [0603]  29.08,77.9 180 top
R66  1k  [0603]  34.98,65.2 0 top
R67  10k  [0603]  55.02,76.43 180 top
R68  2.2k  [0603]  55.37,64.82 0 top
R69  2.2k  [0603]  55.4,66.52 0 top
R70  10k  [0603]  54.99,77.9 180 top
R71  1k  [0603]  60.88,65.2 0 top
R72  10k  [0603]  80.92,76.43 180 top
R73  2.2k  [0603]  81.28,64.82 0 top
R74  2.2k  [0603]  81.31,66.52 0 top
R75  10k  [0603]  80.9,77.9 180 top
R76  1k  [0603]  86.79,65.2 0 top
R77  10k  [0603]  106.83,76.43 180 top
R78  2.2k  [0603]  107.19,64.82 0 top
R79  2.2k  [0603]  107.21,66.52 0 top
R80  10k  [0603]  106.81,77.9 180 top
R81  1k  [0603]  112.7,65.2 0 top
R82  10k  [0603]  132.74,76.43 180 top
R83  2.2k  [0603]  133.1,64.82 0 top
R84  2.2k  [0603]  133.12,66.52 0 top
R85  10k  [0603]  132.72,77.9 180 top
R86  1k  [0603]  138.61,65.2 0 top
R87  10k  [0603]  158.65,76.43 180 top
R88  2.2k  [0603]  159,64.82 0 top
R89  2.2k  [0603]  159.03,66.52 0 top
R90  10k  [0603]  158.62,77.9 180 top
R91  1k  [0603]  9.07,91.11 0 top
R92  10k  [0603]  29.11,102.34 180 top
R93  2.2k  [0603]  29.46,90.73 0 top
R94  2.2k  [0603]  29.49,92.43 0 top
R95  10k  [0603]  29.08,103.81 180 top
R96  1k  [0603]  34.98,91.11 0 top
R97  10k  [0603]  55.02,102.34 180 top
R98  2.2k  [0603]  55.37,90.73 0 top
R99  2.2k  [0603]  55.4,92.43 0 top
R100  10k  [0603]  54.99,103.81 180 top
R101  1k  [0603]  60.88,91.11 0 top
R102  10k  [0603]  80.92,102.34 180 top
R103  2.2k  [0603]  81.28,90.73 0 top
R104  2.2k  [0603]  81.31,92.43 0 top
R105  10k  [0603]  80.9,103.81 180 top
R106  1k  [0603]  86.79,91.11 0 top
R107  10k  [0603]  106.83,102.34 180 top
R108  2.2k  [0603]  107.19,90.73 0 top
R109  2.2k  [0603]  107.21,92.43 0 top
R110  10k  [0603]  106.81,103.81 180 top
R111  1k  [0603]  112.7,91.11 0 top
R112  10k  [0603]  132.74,102.34 180 top
R113  2.2k  [0603]  133.1,90.73 0 top
R114  2.2k  [0603]  133.12,92.43 0 top
R115  10k  [0603]  132.72,103.81 180 top
R116  1k  [0603]  138.61,91.11 0 top
R117  10k  [0603]  158.65,102.34 180 top
R118  2.2k  [0603]  159,90.73 0 top
R119  2.2k  [0603]  159.03,92.43 0 top
R120  10k  [0603]  158.62,103.81 180 top
U1  AS6212  [WLCSP]  45.47,19.56 0 top
U2  AS6212  [WLCSP]  19.56,19.56 0 top
U3  AS6212  [WLCSP]  71.37,19.56 0 top
U4  AS6212  [WLCSP]  97.28,19.56 0 top
U5  AS6212  [WLCSP]  123.19,19.56 0 top
U6  AS6212  [WLCSP]  149.1,19.56 0 top
U7  AS6212  [WLCSP]  19.56,45.47 0 top
U8  AS6212  [WLCSP]  45.47,45.47 0 top
U9  AS6212  [WLCSP]  71.37,45.47 0 top
U10  AS6212  [WLCSP]  97.28,45.47 0 top
U11  AS6212  [WLCSP]  123.19,45.47 0 top
U12  AS6212  [WLCSP]  149.1,45.47 0 top
U13  AS6212  [WLCSP]  19.56,71.37 0 top
U14  AS6212  [WLCSP]  45.47,71.37 0 top
U15  AS6212  [WLCSP]  71.37,71.37 0 top
U16  AS6212  [WLCSP]  97.28,71.37 0 top
U17  AS6212  [WLCSP]  123.19,71.37 0 top
U18  AS6212  [WLCSP]  149.1,71.37 0 top
U19  AS6212  [WLCSP]  19.56,97.28 0 top
U20  AS6212  [WLCSP]  45.47,97.28 0 top
U21  AS6212  [WLCSP]  71.37,97.28 0 top
U22  AS6212  [WLCSP]  97.28,97.28 0 top
U23  AS6212  [WLCSP]  123.19,97.28 0 top
U24  AS6212  [WLCSP]  149.1,97.28 0 top
U$1  [#LED#10]  9.37,14.55 0 bottom
U$2  [#I2C#11]  29.64,14.61 0 bottom
U$3  [AS62128]  11.51,19.41 0 bottom
U$4  [#AD0#1]  30.25,21.34 0 bottom
U$5  [#AD1#1]  30.33,25.27 0 bottom
U$6  [SCL3]  28.02,23.24 0 bottom
U$7  [VCC4]  28.02,27.13 0 bottom
U$8  [DEFAULT#11]  28.04,17.86 0 bottom
U$9  [GND5]  24.23,27.1 0 bottom
U$10  [SDA6]  24.21,23.27 0 bottom
U$11  [#ALRT#AD1#12]  23.39,13.13 90 bottom
U$12  [#ALRT#AD1#12]  23.34,13.13 90 top
U$13  [VCC4]  27.99,19.46 0 bottom
U$14  [GND5]  24.21,19.43 0 bottom
U$15  [QWIIC_5.5MM]  10.03,24.18 0 top
U$16  [SENSOR8]  11.4,21.03 0 bottom
U$17  [TEMP9]  11.48,22.43 0 bottom
U$18  [0X4812]  28.09,16.56 0 bottom
U$19  [PWR12]  12.52,14.86 0 top
U$20  [#3V3#13]  15.72,10.74 90 bottom
U$21  [#3V3#13]  15.72,10.74 90 top
U$22  [QWIIC_5.5MM]  35.94,24.18 0 top
U$23  [TEMPERATURE_SENSOR7]  45.62,26.14 0 top
U$24  [TEMPERATURE_SENSOR7]  19.71,26.14 0 top
U$25  [AS62128]  19.46,24.66 0 top
U$26  [#GND#62130]  13.21,10.85 90 top
U$27  [AS62128]  45.36,24.66 0 top
U$28  [#SDA#62131]  18.29,10.82 90 top
U$29  [#SCL#62132]  20.83,10.67 90 top
U$30  [#GND#62130]  13.21,10.85 90 bottom
U$31  [#ADD0#0]  25.91,11.3 90 top
U$32  [#GND#62130]  39.12,10.85 90 top
U$33  [#SDA#62131]  44.2,10.82 90 top
U$34  [#SDA#62131]  18.29,10.82 90 bottom
U$35  [#SCL#62132]  20.83,10.67 90 bottom
U$36  [#ADD0#0]  25.91,11.3 90 bottom
U$37  [#SCL#62132]  46.74,10.67 90 top
U$38  [#ADD0#0]  51.82,11.3 90 top
U$39  [#GND#62130]  39.12,10.85 90 bottom
U$40  [#SDA#62131]  44.2,10.82 90 bottom
U$41  [#SCL#62132]  46.74,10.67 90 bottom
U$42  [#ADD0#0]  51.82,11.3 90 bottom
U$43  [AS62128]  37.41,19.41 0 bottom
U$44  [#AD0#1]  56.16,21.34 0 bottom
U$45  [#AD1#1]  56.24,25.27 0 bottom
U$46  [SCL3]  53.92,23.24 0 bottom
U$47  [VCC4]  53.92,27.13 0 bottom
U$48  [GND5]  50.14,27.1 0 bottom
U$49  [SDA6]  50.11,23.27 0 bottom
U$50  [VCC4]  53.9,19.46 0 bottom
U$51  [GND5]  50.11,19.43 0 bottom
U$52  [SENSOR8]  37.31,21.03 0 bottom
U$53  [TEMP9]  37.39,22.43 0 bottom
U$54  [#LED#10]  35.28,14.55 0 bottom
U$55  [#I2C#11]  55.55,14.61 0 bottom
U$56  [DEFAULT#11]  53.95,17.86 0 bottom
U$57  [0X4812]  54,16.56 0 bottom
U$58  [#ALRT#AD1#12]  49.3,13.13 90 bottom
U$59  [#ALRT#AD1#12]  49.25,13.13 90 top
U$60  [PWR12]  38.43,14.86 0 top
U$61  [#3V3#13]  41.63,10.74 90 bottom
U$62  [#3V3#13]  41.63,10.74 90 top
U$63  [QWIIC_5.5MM]  61.85,24.18 0 top
U$64  [TEMPERATURE_SENSOR7]  71.53,26.14 0 top
U$65  [AS62128]  71.27,24.66 0 top
U$66  [#GND#62130]  65.02,10.85 90 top
U$67  [#SDA#62131]  70.1,10.82 90 top
U$68  [#SCL#62132]  72.64,10.67 90 top
U$69  [#ADD0#0]  77.72,11.3 90 top
U$70  [#GND#62130]  65.02,10.85 90 bottom
U$71  [#SDA#62131]  70.1,10.82 90 bottom
U$72  [#SCL#62132]  72.64,10.67 90 bottom
U$73  [#ADD0#0]  77.72,11.3 90 bottom
U$74  [AS62128]  63.32,19.41 0 bottom
U$75  [#AD0#1]  82.07,21.34 0 bottom
U$76  [#AD1#1]  82.14,25.27 0 bottom
U$77  [SCL3]  79.83,23.24 0 bottom
U$78  [VCC4]  79.83,27.13 0 bottom
U$79  [GND5]  76.05,27.1 0 bottom
U$80  [SDA6]  76.02,23.27 0 bottom
U$81  [VCC4]  79.81,19.46 0 bottom
U$82  [GND5]  76.02,19.43 0 bottom
U$83  [SENSOR8]  63.22,21.03 0 bottom
U$84  [TEMP9]  63.3,22.43 0 bottom
U$85  [#LED#10]  61.19,14.55 0 bottom
U$86  [#I2C#11]  81.46,14.61 0 bottom
U$87  [DEFAULT#11]  79.86,17.86 0 bottom
U$88  [0X4812]  79.91,16.56 0 bottom
U$89  [#ALRT#AD1#12]  75.21,13.13 90 bottom
U$90  [#ALRT#AD1#12]  75.16,13.13 90 top
U$91  [PWR12]  64.34,14.86 0 top
U$92  [#3V3#13]  67.54,10.74 90 bottom
U$93  [#3V3#13]  67.54,10.74 90 top
U$94  [QWIIC_5.5MM]  87.76,24.18 0 top
U$95  [TEMPERATURE_SENSOR7]  97.43,26.14 0 top
U$96  [AS62128]  97.18,24.66 0 top
U$97  [#GND#62130]  90.93,10.85 90 top
U$98  [#SDA#62131]  96.01,10.82 90 top
U$99  [#SCL#62132]  98.55,10.67 90 top
U$100  [#ADD0#0]  103.63,11.3 90 top
U$101  [#GND#62130]  90.93,10.85 90 bottom
U$102  [#SDA#62131]  96.01,10.82 90 bottom
U$103  [#SCL#62132]  98.55,10.67 90 bottom
U$104  [#ADD0#0]  103.63,11.3 90 bottom
U$105  [AS62128]  89.23,19.41 0 bottom
U$106  [#AD0#1]  107.98,21.34 0 bottom
U$107  [#AD1#1]  108.05,25.27 0 bottom
U$108  [SCL3]  105.74,23.24 0 bottom
U$109  [VCC4]  105.74,27.13 0 bottom
U$110  [GND5]  101.96,27.1 0 bottom
U$111  [SDA6]  101.93,23.27 0 bottom
U$112  [VCC4]  105.71,19.46 0 bottom
U$113  [GND5]  101.93,19.43 0 bottom
U$114  [SENSOR8]  89.13,21.03 0 bottom
U$115  [TEMP9]  89.2,22.43 0 bottom
U$116  [#LED#10]  87.1,14.55 0 bottom
U$117  [#I2C#11]  107.37,14.61 0 bottom
U$118  [DEFAULT#11]  105.77,17.86 0 bottom
U$119  [0X4812]  105.82,16.56 0 bottom
U$120  [#ALRT#AD1#12]  101.12,13.13 90 bottom
U$121  [#ALRT#AD1#12]  101.07,13.13 90 top
U$122  [PWR12]  90.25,14.86 0 top
U$123  [#3V3#13]  93.45,10.74 90 bottom
U$124  [#3V3#13]  93.45,10.74 90 top
U$125  [QWIIC_5.5MM]  113.67,24.18 0 top
U$126  [TEMPERATURE_SENSOR7]  123.34,26.14 0 top
U$127  [AS62128]  123.09,24.66 0 top
U$128  [#GND#62130]  116.84,10.85 90 top
U$129  [#SDA#62131]  121.92,10.82 90 top
U$130  [#SCL#62132]  124.46,10.67 90 top
U$131  [#ADD0#0]  129.54,11.3 90 top
U$132  [#GND#62130]  116.84,10.85 90 bottom
U$133  [#SDA#62131]  121.92,10.82 90 bottom
U$134  [#SCL#62132]  124.46,10.67 90 bottom
U$135  [#ADD0#0]  129.54,11.3 90 bottom
U$136  [AS62128]  115.14,19.41 0 bottom
U$137  [#AD0#1]  133.88,21.34 0 bottom
U$138  [#AD1#1]  133.96,25.27 0 bottom
U$139  [SCL3]  131.65,23.24 0 bottom
U$140  [VCC4]  131.65,27.13 0 bottom
U$141  [GND5]  127.86,27.1 0 bottom
U$142  [SDA6]  127.84,23.27 0 bottom
U$143  [VCC4]  131.62,19.46 0 bottom
U$144  [GND5]  127.84,19.43 0 bottom
U$145  [SENSOR8]  115.04,21.03 0 bottom
U$146  [TEMP9]  115.11,22.43 0 bottom
U$147  [#LED#10]  113,14.55 0 bottom
U$148  [#I2C#11]  133.27,14.61 0 bottom
U$149  [DEFAULT#11]  131.67,17.86 0 bottom
U$150  [0X4812]  131.72,16.56 0 bottom
U$151  [#ALRT#AD1#12]  127.03,13.13 90 bottom
U$152  [#ALRT#AD1#12]  126.97,13.13 90 top
U$153  [PWR12]  116.15,14.86 0 top
U$154  [#3V3#13]  119.35,10.74 90 bottom
U$155  [#3V3#13]  119.35,10.74 90 top
U$156  [QWIIC_5.5MM]  139.57,24.18 0 top
U$157  [TEMPERATURE_SENSOR7]  149.25,26.14 0 top
U$158  [AS62128]  149,24.66 0 top
U$159  [#GND#62130]  142.75,10.85 90 top
U$160  [#SDA#62131]  147.83,10.82 90 top
U$161  [#SCL#62132]  150.37,10.67 90 top
U$162  [#ADD0#0]  155.45,11.3 90 top
U$163  [#GND#62130]  142.75,10.85 90 bottom
U$164  [#SDA#62131]  147.83,10.82 90 bottom
U$165  [#SCL#62132]  150.37,10.67 90 bottom
U$166  [#ADD0#0]  155.45,11.3 90 bottom
U$167  [AS62128]  141.05,19.41 0 bottom
U$168  [#AD0#1]  159.79,21.34 0 bottom
U$169  [#AD1#1]  159.87,25.27 0 bottom
U$170  [SCL3]  157.56,23.24 0 bottom
U$171  [VCC4]  157.56,27.13 0 bottom
U$172  [GND5]  153.77,27.1 0 bottom
U$173  [SDA6]  153.75,23.27 0 bottom